# Altium PCB moteus_n1.PcbDoc (part 1 of 2)
Units mm, origin at the board's own origin, x right, y up, seen from the top; angles counter-clockwise.
Board outline 46 x 46 mm, 4 copper layers (Top, Route2, Route15, Bottom), stack 1.69 mm thick; 192 components, 104 nets, 644 pads, 479 vias.
Unrouted connection lines stored in the file: 50.
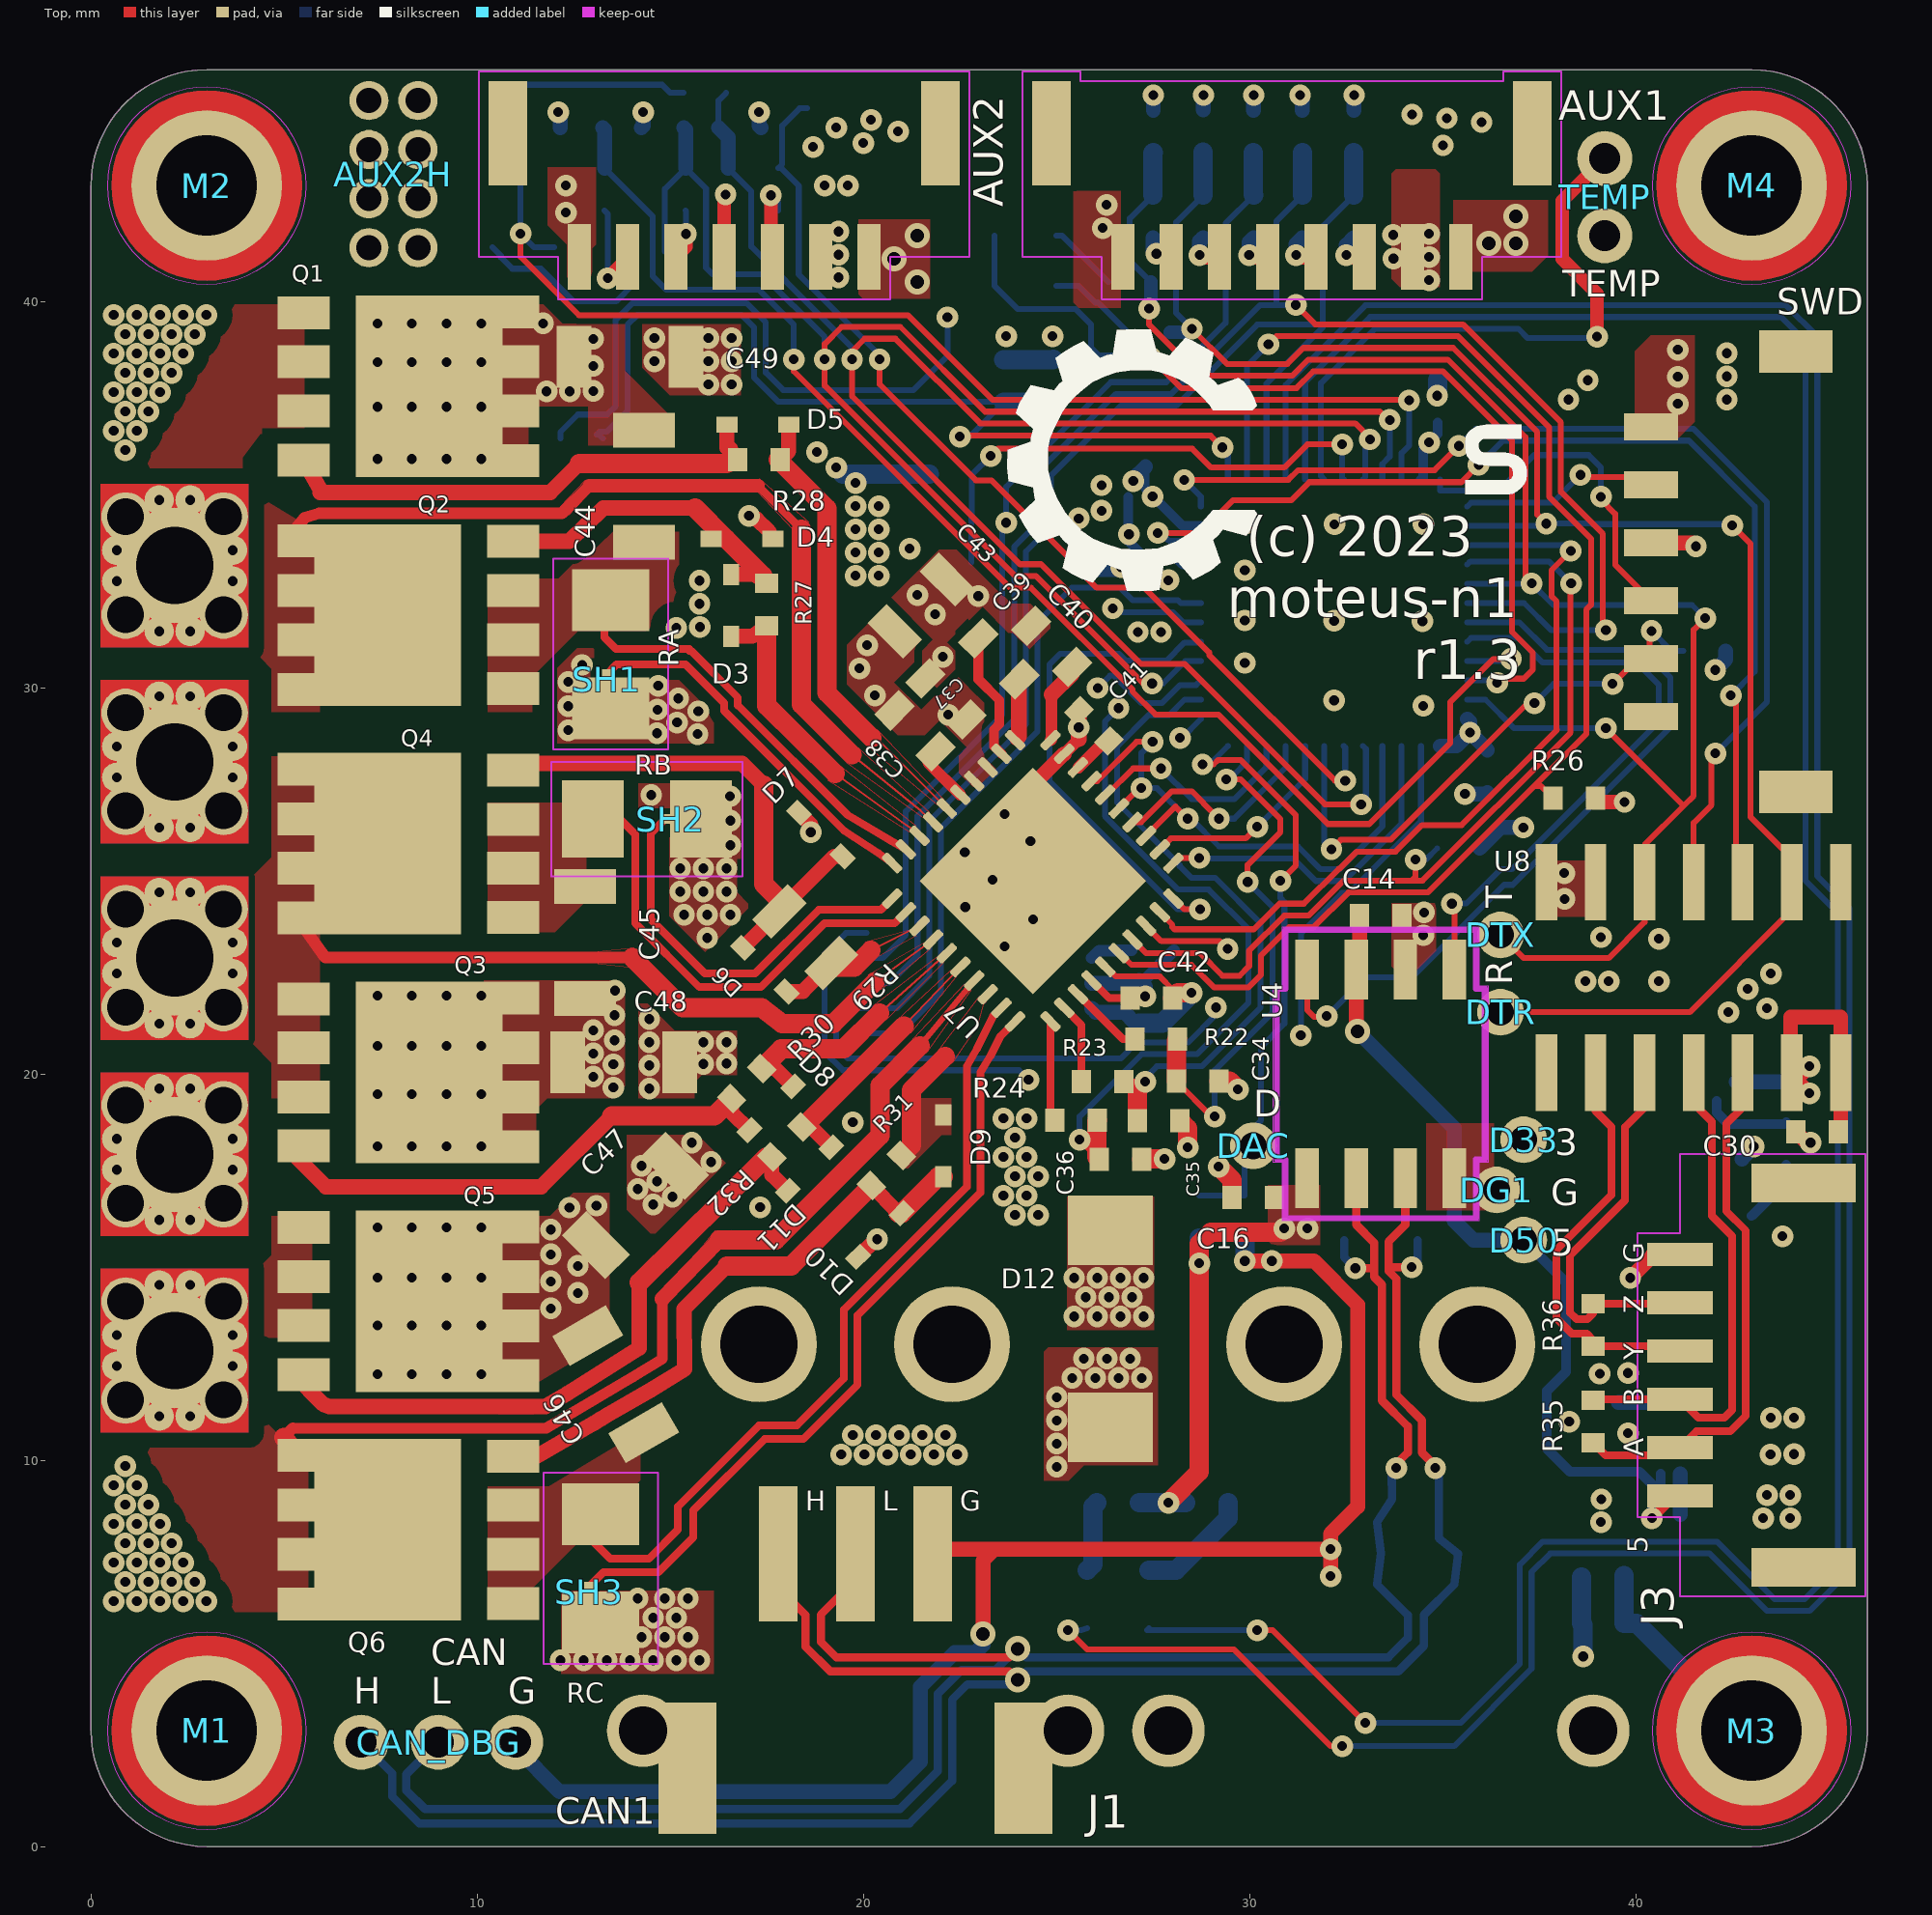
[diagram p0: Top view]
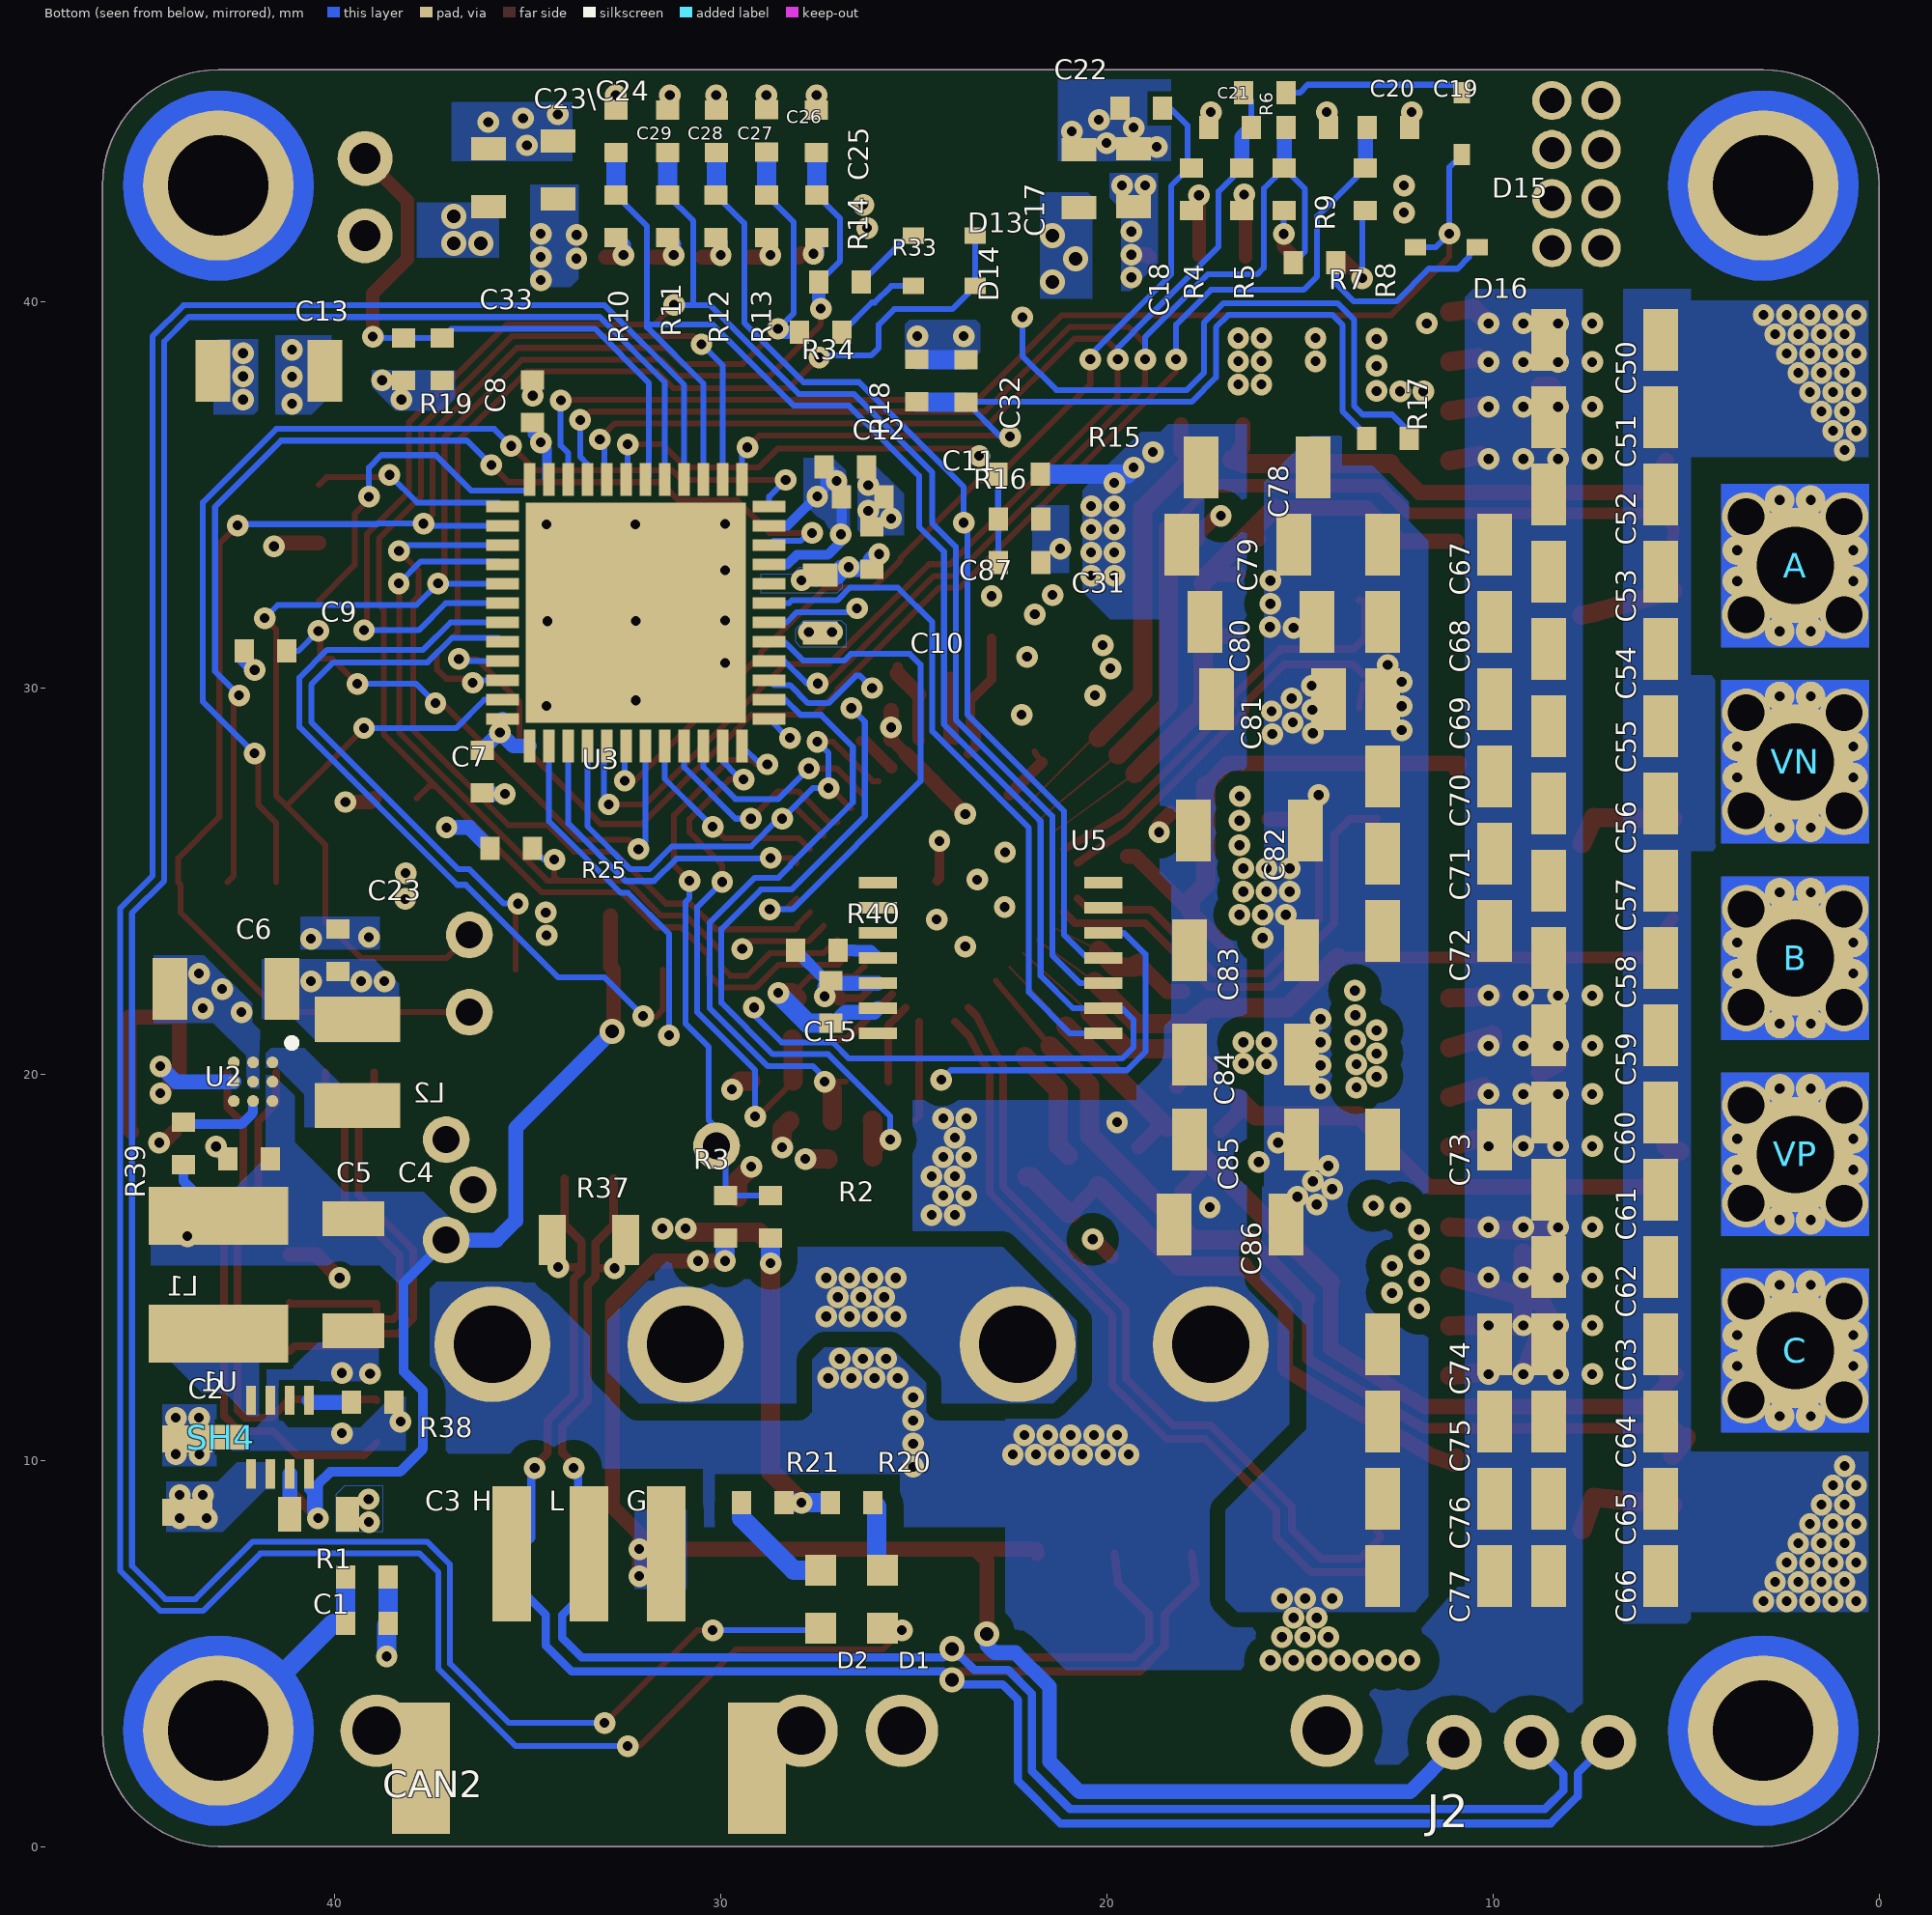
[diagram p1: Bottom view, seen from below]
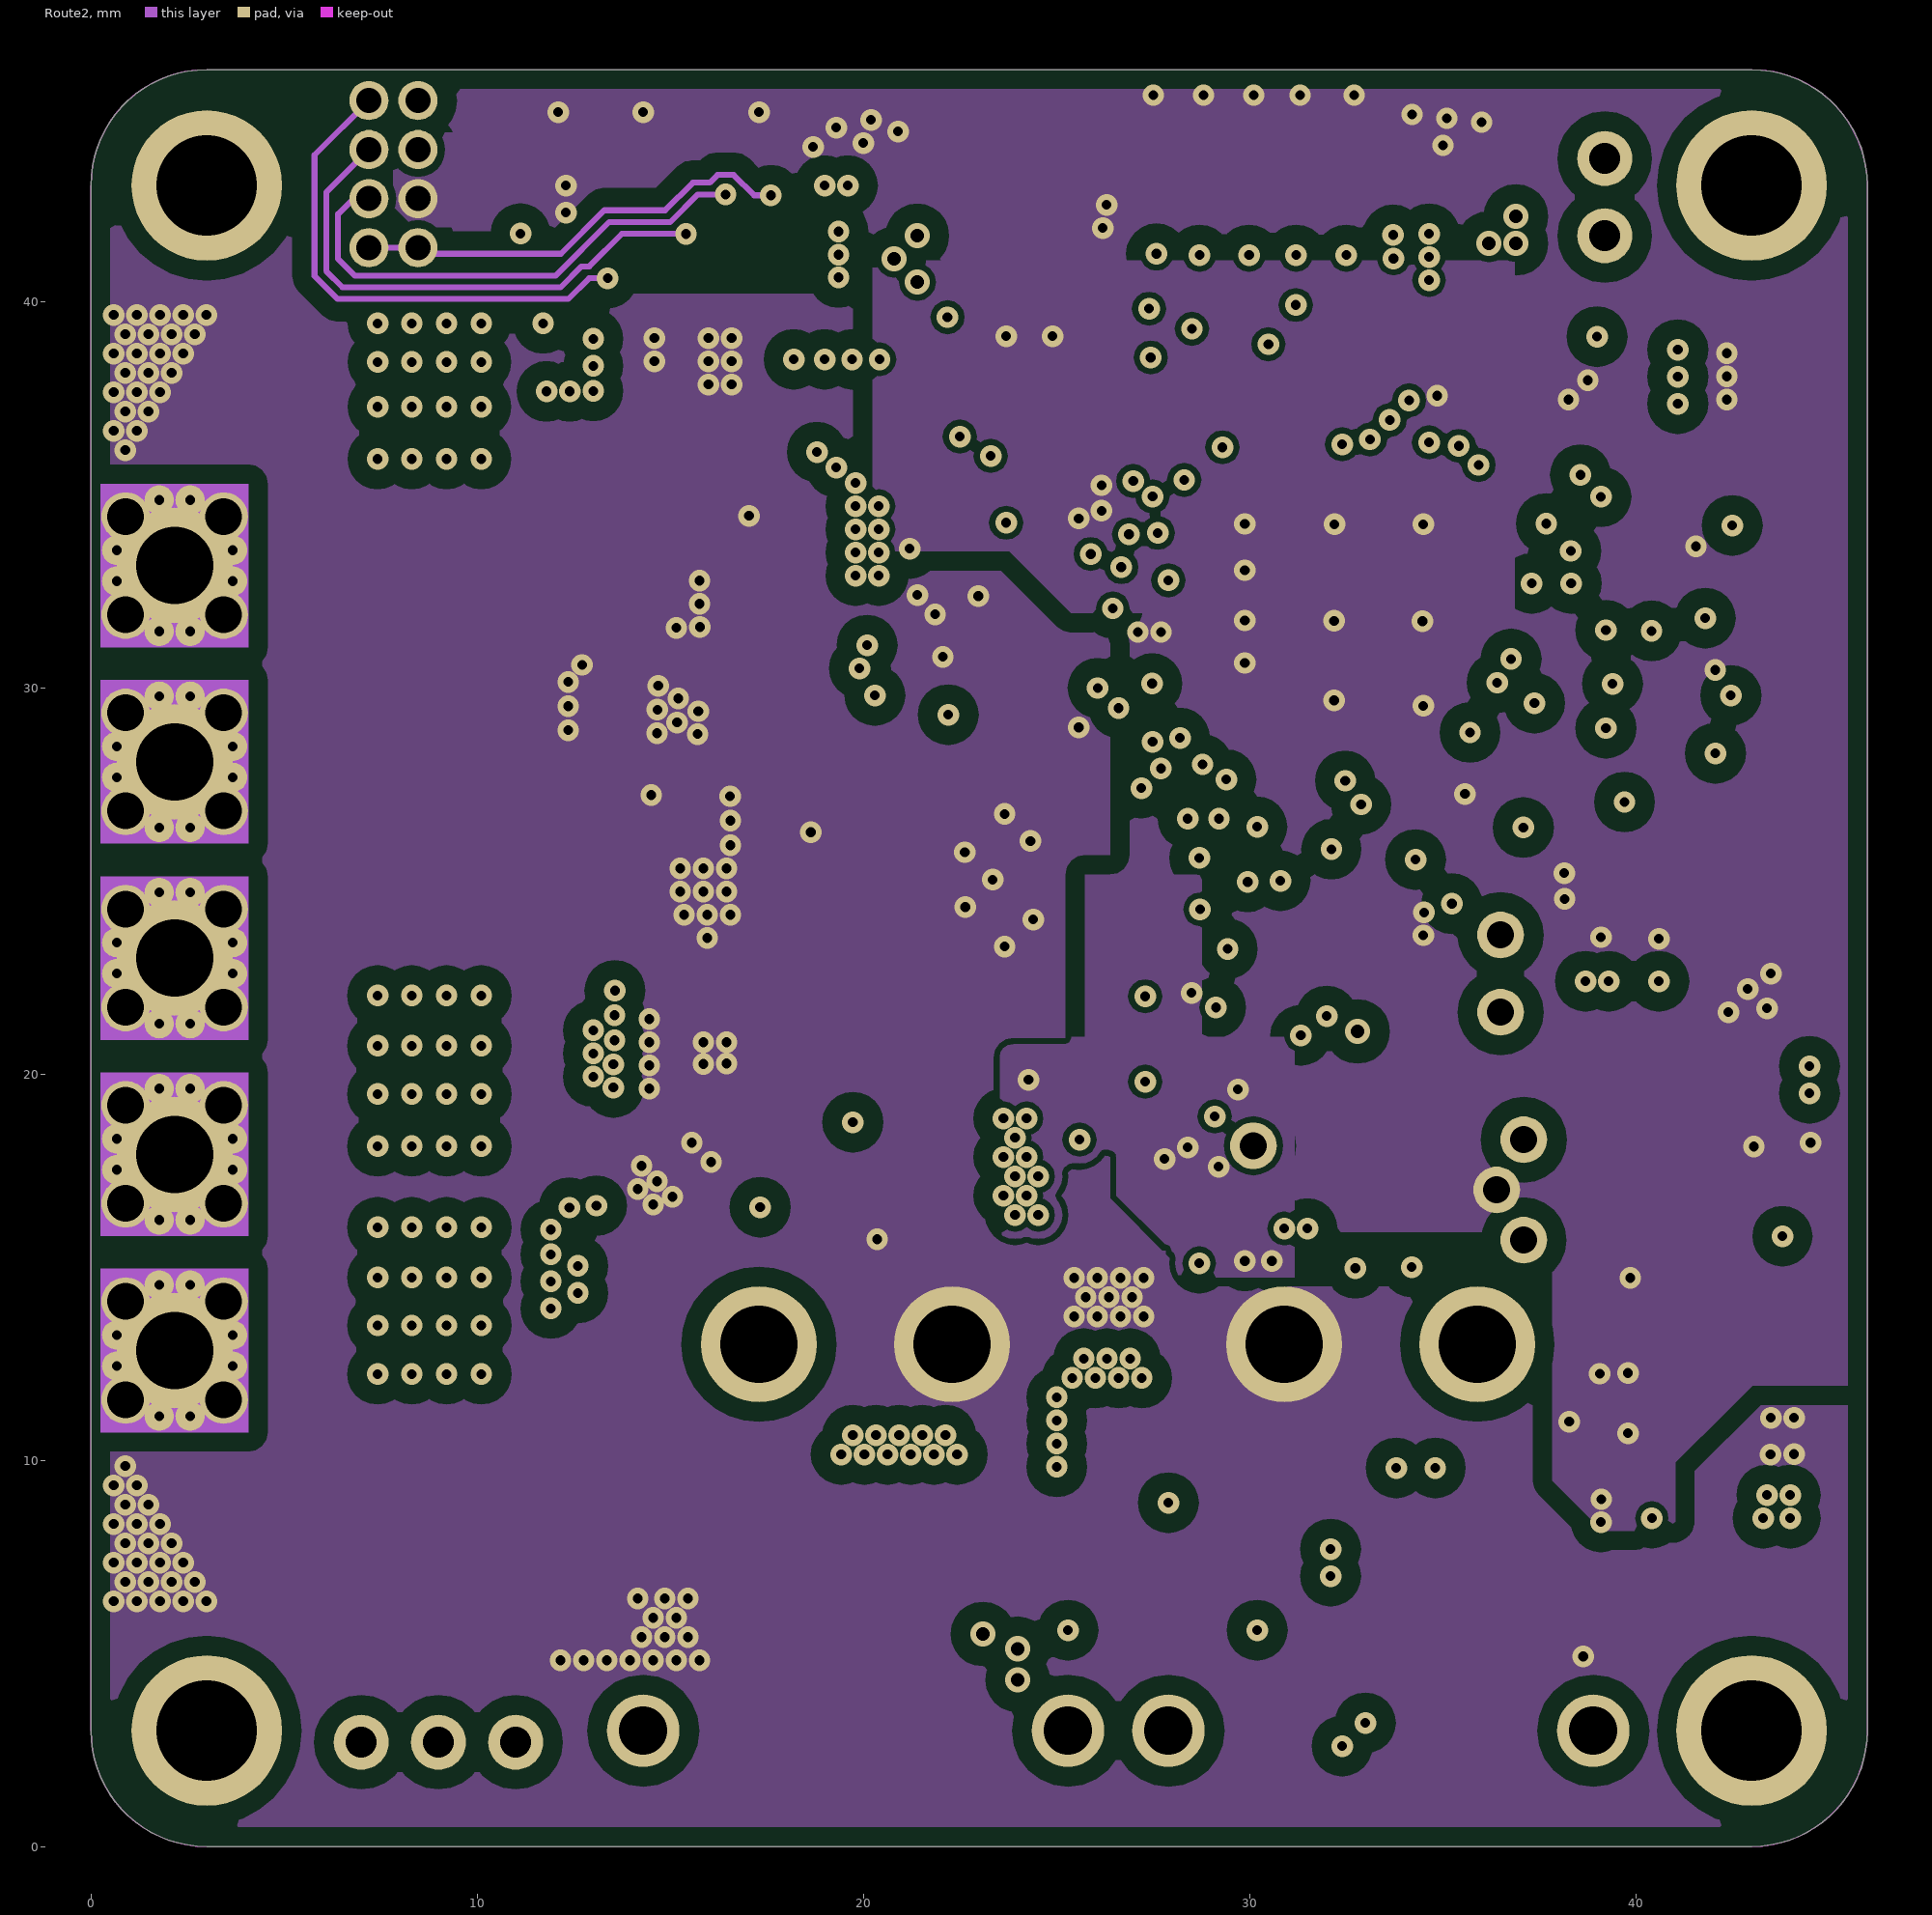
[diagram p2: Route2]
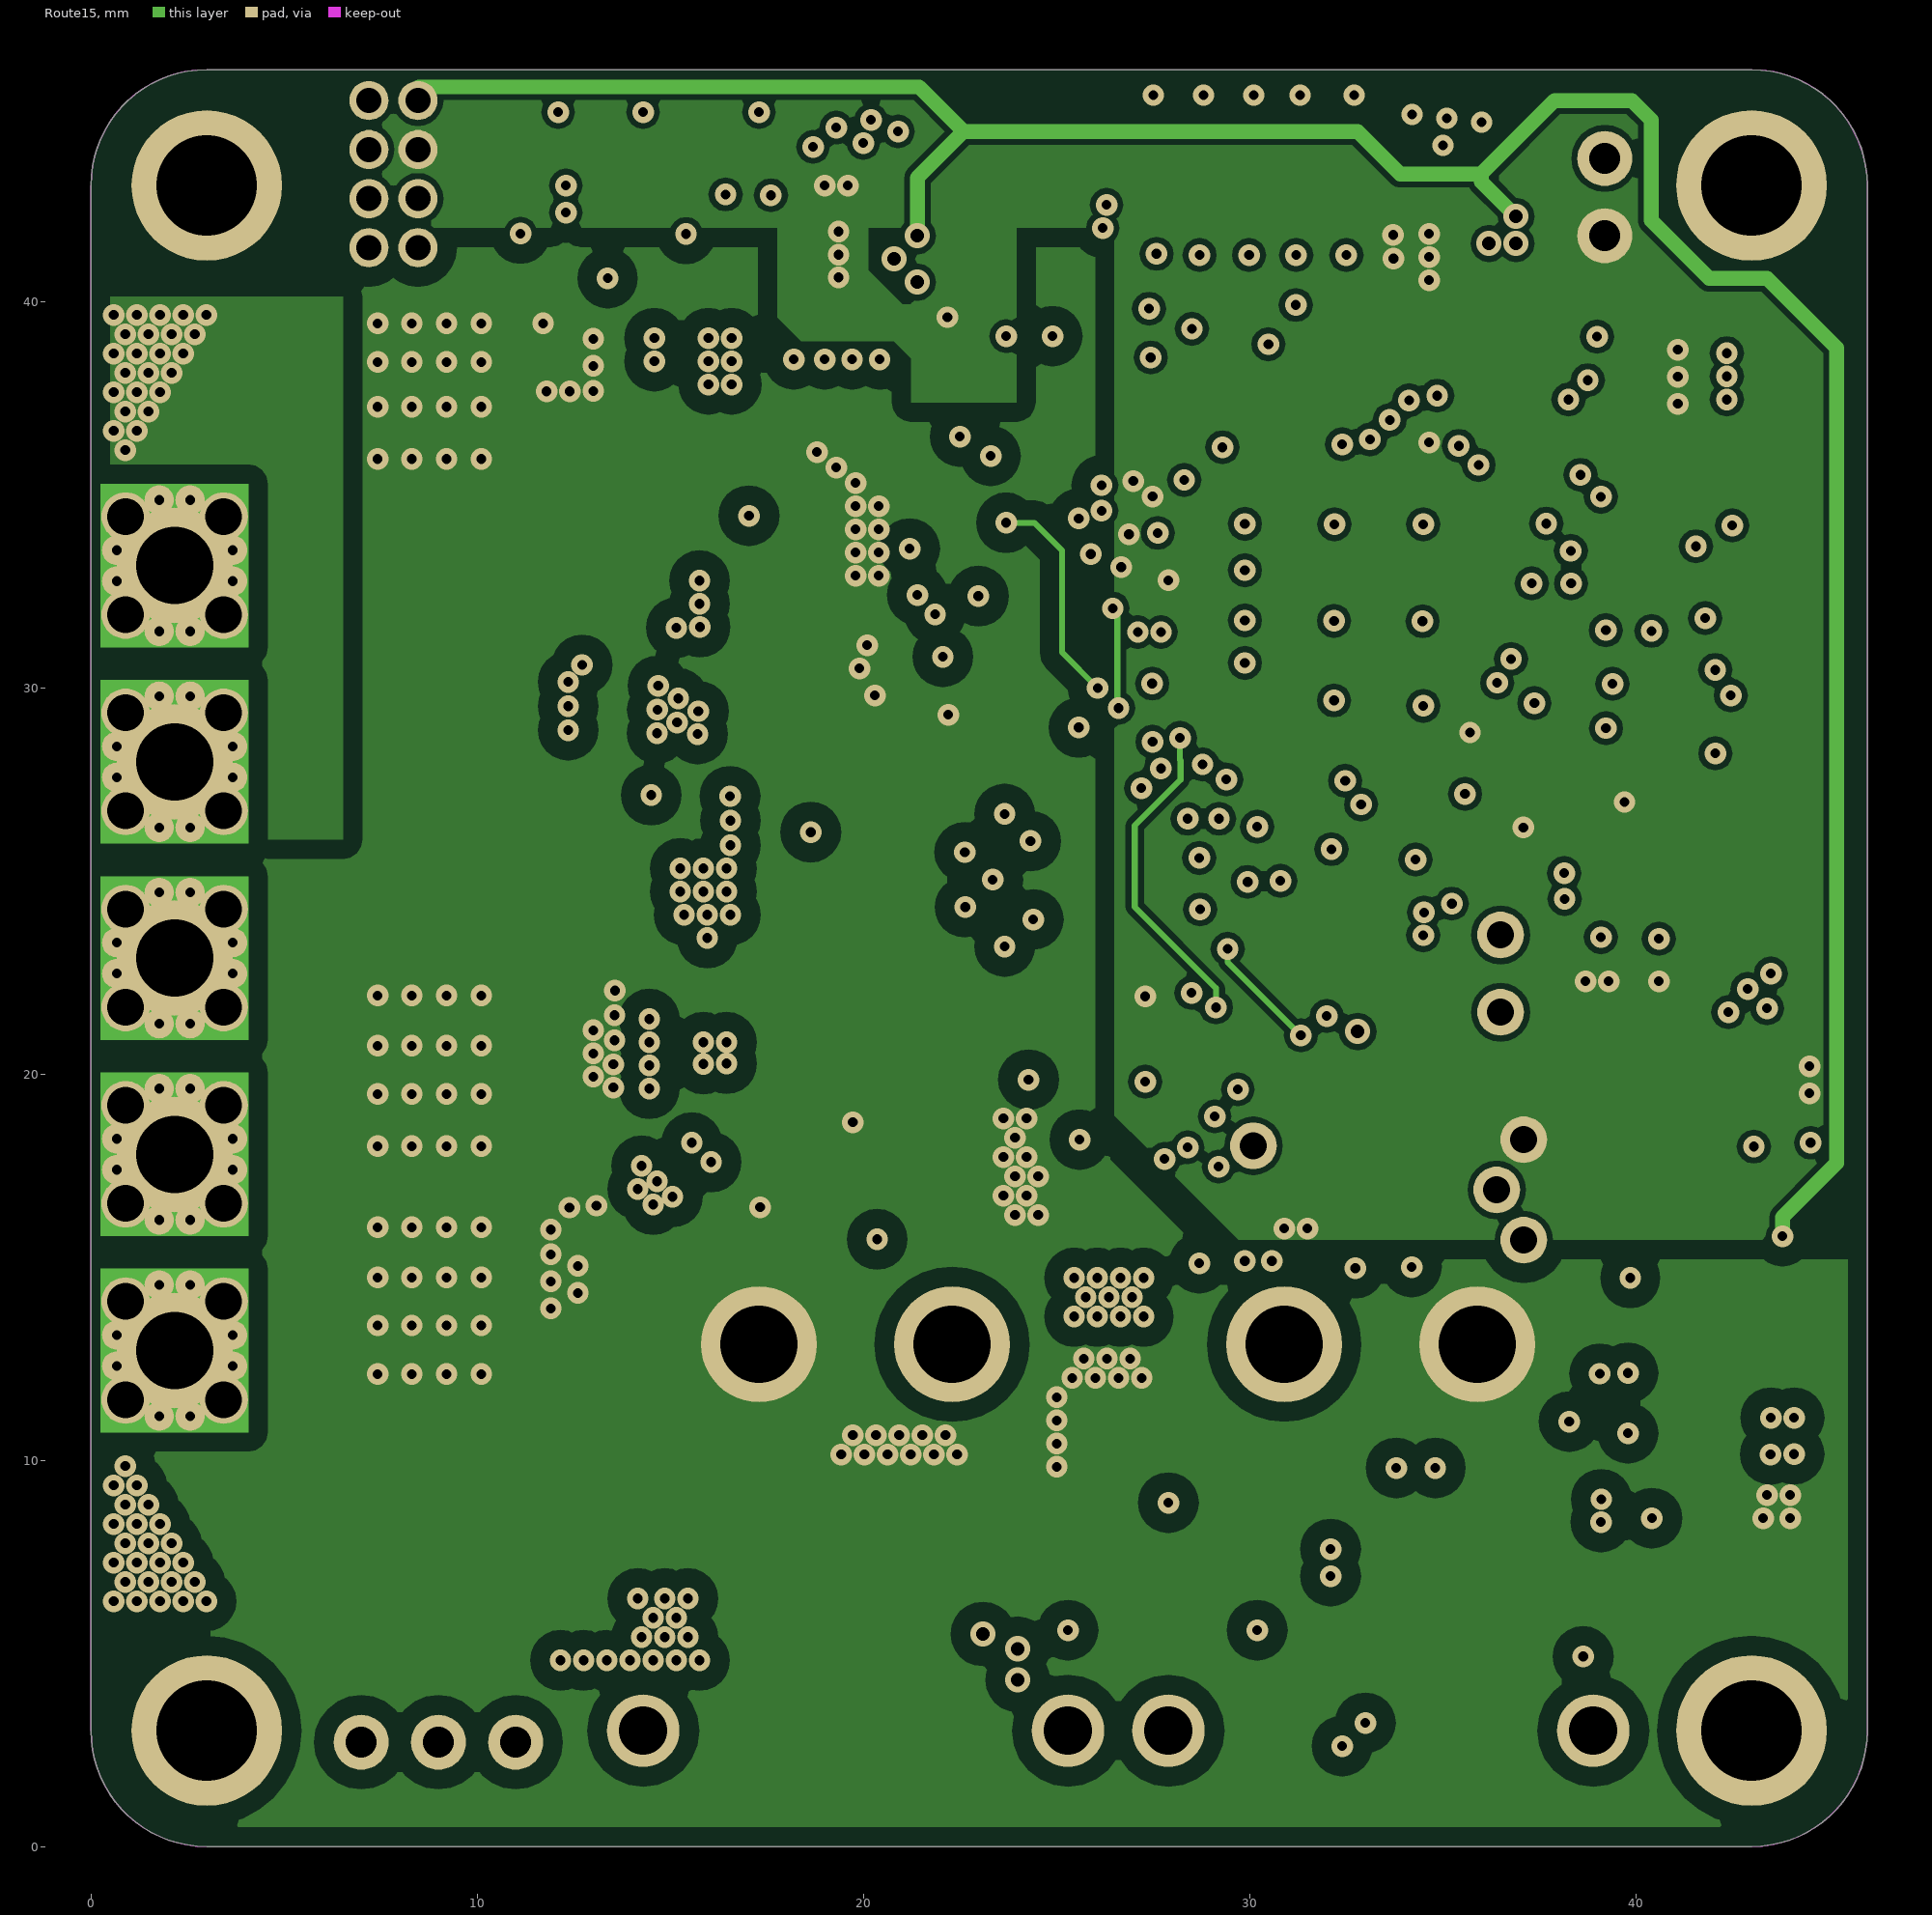
[diagram p3: Route15]

## Layer stack, top to bottom
Top Solder: solder mask 0.0102, Solder Resist, Dk 3.5
Top: signal copper 0.07
Dielectric 1: core 0.23, FR-4, Dk 4.8
Route2: signal copper 0.035
Dielectric2: core 0.93, FR-4, Dk 4.8
Route15: signal copper 0.035
Dielectric3: dielectric 0.32, FR-4, Dk 4.8
Bottom: signal copper 0.07
Bottom Solder: solder mask 0.0102, Solder Resist, Dk 3.5

## Board outline
3,46 ccw(c3,43) 0,43 0,3 ccw(c3,3) 3,0 43,0 ccw(c43,3) 46,3 46,43 ccw(c43,43) 43,46

## Design rules (kind name [scope] priority, off if disabled: settings)
BoardOutlineClearance mdCopperDimension [All] p1: gap=0.254 ignorepadtopadclearanceinfootprint=FALSE except(0: Arc-SplitContinuation Track-SplitContinuation SMDPad-SplitContinuation THPad-SplitContinuation Via-SplitContinuation Fill-SplitContinuation Poly-SplitContinuation Region-SplitContinuation Text-SplitContinuation)
Clearance Clearance_for_PolygonClass_Isolate_15.75 [InPolygonClass('Isolate_15.75') vs IsArc Or IsTrack Or IsPad Or IsVia Or IsFill Or IsRegion Or IsText] p1: gap=0.4 ignorepadtopadclearanceinfootprint=FALSE
Clearance Clearance_for_PolygonClass_Isolate_17.72 [InPolygonClass('Isolate_17.72') vs IsArc Or IsTrack Or IsPad Or IsVia Or IsFill Or IsRegion Or IsText] p2: gap=0.45 ignorepadtopadclearanceinfootprint=FALSE
Clearance Clearance_for_PolygonClass_Isolate_7.87 [InPolygonClass('Isolate_7.87') vs IsArc Or IsTrack Or IsPad Or IsVia Or IsFill Or IsRegion Or IsText] p3: gap=0.2 ignorepadtopadclearanceinfootprint=FALSE
Clearance Clearance_for_PolygonClass_Isolate_11.81 [InPolygonClass('Isolate_11.81') vs IsArc Or IsTrack Or IsPad Or IsVia Or IsFill Or IsRegion Or IsText] p4: gap=0.3 ignorepadtopadclearanceinfootprint=FALSE
Clearance Clearance_for_PolygonClass_Isolate_19.69 [InPolygonClass('Isolate_19.69') vs IsArc Or IsTrack Or IsPad Or IsVia Or IsFill Or IsRegion Or IsText] p5: gap=0.5 ignorepadtopadclearanceinfootprint=FALSE
Clearance "Clearance (Same Net)" [All] p6: gap=0.152 ignorepadtopadclearanceinfootprint=FALSE
Clearance Clearance_for_NetClass_HV [InNetClass('HV') vs InNetClass('HV')] p7: gap=0.13 ignorepadtopadclearanceinfootprint=FALSE
Clearance Clearance_for_NetClass_CAN [InNetClass('CAN') vs InNetClass('CAN')] p8: gap=0.127 ignorepadtopadclearanceinfootprint=FALSE
Clearance [All] p9: gap=0.152 ignorepadtopadclearanceinfootprint=FALSE
HoleSize HoleSize_For_NetClass_GATE [InNetClass('GATE')] p1: absolutevalues=TRUE maxlimit=0 minlimit=0 maxpercent=80.000 minpercent=20.000
HoleSize HoleSize_For_NetClass_HV [InNetClass('HV')] p2: absolutevalues=TRUE maxlimit=0 minlimit=0 maxpercent=80.000 minpercent=20.000
HoleSize HoleSize_For_NetClass_CAN [InNetClass('CAN')] p3: absolutevalues=TRUE maxlimit=0 minlimit=0 maxpercent=80.000 minpercent=20.000
HoleSize [All] p4: absolutevalues=TRUE maxlimit=2540 minlimit=0.254 maxpercent=80.000 minpercent=20.000
HoleToHoleClearance mdDrill [All] p1: gap=0.254 allowstackedmicrovias=TRUE
MinimumSolderMaskSliver [All] p1 off: minsoldermaskwidth=0.254
PasteMaskExpansion Expansion_SMDPaste_OFF [InPadClass('SMDPaste_OFF')] p1: expansion=0
PasteMaskExpansion mlMinCreamFrame [All] p2: expansion=0
PolygonConnect PolygonConnect_For_PolygonThermal_ON_Width100000_Gap100000 [InPolygonClass('PolygonThermal_ON_Width100000_Gap100000') vs Not IsVia] p1: connectstyle=Relief reliefconductorwidth=0.254 reliefentries=4 polygonreliefangle="90 Angle" airgapwidth=0.254
PolygonConnect PolygonConnect_For_PolygonThermal_ON_Width19700_Gap100000 [InPolygonClass('PolygonThermal_ON_Width19700_Gap100000') vs Not IsVia] p2: connectstyle=Relief reliefconductorwidth=0.05 reliefentries=4 polygonreliefangle="90 Angle" airgapwidth=0.254
PolygonConnect PolygonConnect_For_PolygonThermal_OFF [InPolygonClass('PolygonThermal_OFF')] p3: connectstyle=Direct reliefconductorwidth=0.254 reliefentries=4 polygonreliefangle="90 Angle" airgapwidth=0.254
PolygonConnect ThermalVias [IsVia] p4: connectstyle=Direct reliefconductorwidth=0.254 reliefentries=4 polygonreliefangle="90 Angle" airgapwidth=0.254
PolygonConnect [All] p5: connectstyle=Relief reliefconductorwidth=0.254 reliefentries=4 polygonreliefangle="90 Angle" airgapwidth=0.254
RoutingVias [All] p1: holewidth=0.254 width=0.559 viastyle="Through Hole" minholewidth=0.254 minwidth=0.559 maxholewidth=2.54 maxwidth=2.54
SolderMaskExpansion Expansion_SMDSolder_OFF [InPadClass('SMDSolder_OFF')] p1: expansion=0 istentingtop=FALSE
SolderMaskExpansion mlMinStopFrame [All] p2: expansion=0.051 istentingtop=FALSE
Width Width_For_NetClass_GATE [InNetClass('GATE')] p1: maxlimit=0.768 minlimit=0.254 preferedwidth=0.384
Width Width_For_NetClass_HV [InNetClass('HV')] p2: maxlimit=0.254 minlimit=2539.975 preferedwidth=0.127 toplayer_minwidth=0 midlayer1_minwidth=0 midlayer14_minwidth=0 bottomlayer_minwidth=0 minimp=50.000000 maximp=50.000000 favimp=50.000000
Width Width_For_NetClass_CAN [InNetClass('CAN')] p3: maxlimit=0.254 minlimit=0.216 preferedwidth=0.216
Width [All] p4: maxlimit=0.254 minlimit=0.152 preferedwidth=0.152
26 further rules are at their usual default settings.

## Classes and differential pairs
polygon class PolygonThermal_ON_Width100000_Gap100000: Polygon_3_Net_V-
polygon class PolygonThermal_ON_Width19700_Gap100000: Polygon_1_Net_GHC_D
polygon class PolygonThermal_OFF: Polygon_1_Net_+3V3 Polygon_1_Net_+5V Polygon_1_Net_GHA Polygon_1_Net_GHB Polygon_1_Net_GHC Polygon_1_Net_GLA Polygon_1_Net_GLB Polygon_1_Net_GLC Polygon_1_Net_GND Polygon_1_Net_N$5 Polygon_1_Net_SHA Polygon_1_Net_SHB Polygon_1_Net_SHC Polygon_1_Net_SXA_P Polygon_1_Net_SXB_P Polygon_1_Net_SXC_P Polygon_1_Net_V+ Polygon_1_Net_V- Polygon_1_Net_VSW Polygon_2_Net_+3V3 Polygon_2_Net_+5V Polygon_2_Net_GLC Polygon_2_Net_GND Polygon_2_Net_SHA Polygon_2_Net_SHB Polygon_2_Net_SHC Polygon_2_Net_V+ Polygon_2_Net_V- Polygon_3_Net_+3V3 Polygon_3_Net_+5V Polygon_3_Net_GND Polygon_3_Net_SHA Polygon_3_Net_SHB Polygon_3_Net_SHC Polygon_3_Net_V+ Polygon_4_Net_+3V3 Polygon_4_Net_+5V Polygon_4_Net_GND Polygon_4_Net_SHA Polygon_4_Net_V+ Polygon_4_Net_V- Polygon_5_Net_+3V3 Polygon_5_Net_+5V Polygon_5_Net_GND Polygon_5_Net_V+ Polygon_5_Net_V- Polygon_6_Net_+3V3 Polygon_6_Net_+5V Polygon_6_Net_GND Polygon_6_Net_V+ Polygon_6_Net_V- Polygon_7_Net_+3V3 Polygon_7_Net_GND Polygon_7_Net_V+ Polygon_7_Net_V- Polygon_8_Net_+3V3 Polygon_8_Net_GND Polygon_8_Net_V+ Polygon_8_Net_V- Polygon_9_Net_+3V3 Polygon_9_Net_GND Polygon_9_Net_V+ Polygon_9_Net_V- Polygon_10_Net_+3V3 Polygon_10_Net_GND Polygon_10_Net_V+ Polygon_10_Net_V- Polygon_11_Net_+3V3 Polygon_11_Net_GND Polygon_11_Net_V+ Polygon_11_Net_V- Polygon_12_Net_+3V3 Polygon_12_Net_GND Polygon_12_Net_V+ Polygon_12_Net_V- Polygon_13_Net_GND Polygon_13_Net_V+ Polygon_13_Net_V- Polygon_14_Net_GND Polygon_14_Net_V+ Polygon_14_Net_V- Polygon_15_Net_GND Polygon_15_Net_V+ Polygon_15_Net_V- Polygon_16_Net_GND Polygon_16_Net_V- Polygon_17_Net_GND Polygon_17_Net_V- Polygon_18_Net_GND Polygon_18_Net_V- Polygon_19_Net_GND Polygon_19_Net_V- Polygon_20_Net_GND Polygon_20_Net_V- Polygon_21_Net_GND Polygon_22_Net_GND Polygon_23_Net_GND Polygon_24_Net_GND Polygon_25_Net_GND Polygon_26_Net_GND
polygon class Isolate_15.75: Polygon_1_Net_SXA_P Polygon_2_Net_SHC Polygon_4_Net_SHA Polygon_6_Net_V+ Polygon_9_Net_V+ Polygon_12_Net_V+ Polygon_14_Net_V+ Polygon_15_Net_V- Polygon_17_Net_V-
polygon class Isolate_17.72: Polygon_13_Net_V+
polygon class Isolate_7.87: Polygon_7_Net_V+ Polygon_8_Net_V- Polygon_20_Net_V- Polygon_26_Net_GND
polygon class Isolate_11.81: Polygon_4_Net_V-
polygon class Isolate_19.69: Polygon_1_Net_GND Polygon_1_Net_V+ Polygon_1_Net_V- Polygon_2_Net_V- Polygon_3_Net_GND Polygon_3_Net_V- Polygon_11_Net_V+
pad class SMDSolder_OFF: SH1-1 SH1-2 SH2-1 SH2-2 SH3-1 SH3-2 SH4-1 SH4-2
pad class SMDPaste_OFF: Q1-PAD Q3-PAD Q5-PAD SH1-1 SH1-2 SH2-1 SH2-2 SH3-1 SH3-2 SH4-1 SH4-2 U3-49 U7-PAD
net class GATE: GHA GHA_D GHB GHB_D GHC GHC_D GLA GLA_D GLB GLB_D GLC GLC_D
net class HV: SHA SHB SHC
net class CAN: CAN_N CAN_P

## Components (designator, comment, footprint, x,y, rotation, side; value= is the part's Value field where it differs from the comment)
A "" 16AWG_TERM 2.17,33.16 r90 bottom
AUX1 "" JST_SM08B-GHS-TB(LF)(SN) 31.1,41.15 r180 top
AUX2 "" JST_SM07B-GHS-TB(LF)(SN) 16.4,43 r180 top
AUX2H "" PH2X4 7.2,45.2 r0 top
B "" 16AWG_TERM 2.17,23 r90 bottom
C "" 16AWG_TERM 2.17,12.84 r90 bottom
C1 "" C0402 39.15,5.78 r180 bottom
C2 "" C0805 43.8,9.6 r90 bottom
C3 "" C0603 40.4,8.6 r180 bottom
C4 "" C1206 39.5,14.8 r270 bottom
C5 "" C0402 42.2,17.8 r0 bottom
C6 "" C1206 42.8,22.2 r0 bottom
C7 "" C0402 36.16,27.83 r270 bottom
C8 "" C0402 34.87,37.42 r90 bottom
C9 "" C0402 41.78,30.95 r0 bottom
C10 "" C0603 27.41,32.16 r270 bottom
C11 "" C0402 26.31,34.94 r180 bottom
C12 "" C0402 26.76,35.72 r180 bottom
C13 "" C1206 41.69,38.2 r180 bottom
C14 "" C0402 33.4,24.1 r0 top
C15 "" C0402 27.14,21.87 r270 bottom
C16 "" C0402 30.1,16.8 r180 top
C17 "" C0603 20.71,43.18 r90 bottom
C18 "" C0603 19.3,43.2 r90 bottom
C19 "" C0402 12.7,44.5 r180 bottom
C20 "" C0402 14.8,44.5 r180 bottom
C21 "" C0402 16.8,44.5 r0 bottom
C22 "" C0402 19.1,45 r0 bottom
C23 "" C0402 39.9,23.2 r90 bottom
C23\ "" C0603 36,43.2 r90 bottom
C24 "" C0603 34.2,43.4 r90 bottom
C25 "" C0402 27.51,44.4 r90 bottom
C26 "" C0402 28.8,44.41 r90 bottom
C27 "" C0402 30.1,44.4 r90 bottom
C28 "" C0402 31.37,44.4 r90 bottom
C29 "" C0402 32.7,44.4 r90 bottom
C30 "" C0402 44.7,18.5 r180 top
C31 "" C0402 22.25,33.24 r180 bottom
C32 "" C0402 23.64,37.94 r90 bottom
C33 "" C0402 37.2,38.5 r270 bottom
C34 "" C0402 28.66,19.81 r0 top
C35 "" C0402 27.65,18.79 r0 top
C36 "" C0402 26.66,17.79 r0 top
C37 "" C0603 22.14,29.71 r135 top
C38 "" C0603 21.34,28.88 r315 top
C39 "" C0603 23.51,30.75 r315 top
C40 "" C0603 24.88,31.07 r315 top
C41 "" C0402 25.97,29.01 r315 top
C42 "" C0402 27.46,21.96 r180 top
C43 "" C0805 21.49,32.13 r45 top
C44 "" C1206 14.32,35.21 r270 top
C45 "" C1206 12.8,23.4 r90 top
C46 "" C1206 13.59,11.97 r300 top
C47 "" C1206 14.1,16.6 r45 top
C48 "" C1206 13.8,20.3 r0 top
C49 "" C1206_NOBORDER 13.96,38.57 r0 top
C50 "" C1206_NOBORDER 7.1,39 r180 bottom
C51 "" C1206_NOBORDER 7.1,37 r180 bottom
C52 "" C1206_NOBORDER 7.1,35 r180 bottom
C53 "" C1206_NOBORDER 7.1,33 r180 bottom
C54 "" C1206_NOBORDER 7.1,31 r180 bottom
C55 "" C1206_NOBORDER 7.1,29 r180 bottom
C56 "" C1206_NOBORDER 7.1,27 r180 bottom
C57 "" C1206_NOBORDER 7.1,25 r180 bottom
C58 "" C1206_NOBORDER 7.1,23 r180 bottom
C59 "" C1206_NOBORDER 7.1,21 r180 bottom
C60 "" C1206_NOBORDER 7.1,19 r180 bottom
C61 "" C1206_NOBORDER 7.1,17 r180 bottom
C62 "" C1206_NOBORDER 7.1,15 r180 bottom
C63 "" C1206_NOBORDER 7.1,13 r180 bottom
C64 "" C1206_NOBORDER 7.1,11 r180 bottom
C65 "" C1206_NOBORDER 7.1,9 r180 bottom
C66 "" C1206_NOBORDER 7.1,7 r180 bottom
C67 "" C1206_NOBORDER 11.4,33.7 r0 bottom
C68 "" C1206_NOBORDER 11.4,31.7 r0 bottom
C69 "" C1206_NOBORDER 11.4,29.7 r0 bottom
C70 "" C1206_NOBORDER 11.4,27.7 r0 bottom
C71 "" C1206_NOBORDER 11.4,25.7 r0 bottom
C72 "" C1206_NOBORDER 11.4,23.7 r0 bottom
C73 "" C1206_NOBORDER 11.4,18.3 r0 bottom
C74 "" C1206_NOBORDER 11.4,13 r0 bottom
C75 "" C1206_NOBORDER 11.4,11 r0 bottom
C76 "" C1206_NOBORDER 11.4,9 r0 bottom
C77 "" C1206_NOBORDER 11.4,7 r0 bottom
C78 "" C1206_NOBORDER 16.1,35.7 r180 bottom
C79 "" C1206_NOBORDER 16.6,33.7 r180 bottom
C80 "" C1206_NOBORDER 16,31.7 r180 bottom
C81 "" C1206_NOBORDER 15.7,29.7 r180 bottom
C82 "" C1206_NOBORDER 16.3,26.3 r180 bottom
C83 "" C1206_NOBORDER 16.4,23.2 r180 bottom
C84 "" C1206_NOBORDER 16.4,20.5 r180 bottom
C85 "" C1206_NOBORDER 16.4,18.3 r180 bottom
C86 "" C1206_NOBORDER 16.8,16.1 r180 bottom
C87 "" C0402 26.08,33.62 r90 bottom
CAN1 "" JST_S3B-PH-SM4-TB(LF)(SN) 19.8,4.6 r180 top
CAN2 "" JST_S3B-PH-SM4-TB(LF)(SN) 33.4,4.6 r0 bottom
CAN_DBG "" 1X3 9,2.7 r0 top
D1 "" LED0603 25.8,6.4 r90 bottom
D2 "" LED0603 27.4,6.4 r90 bottom
D3 "" SODFL1608X70N 16.58,32.13 r90 top
D4 "" SODFL1608X70N 16.86,33.85 r0 top
D5 "" SODFL1608X70N 17.27,36.81 r180 top
D6 "" SODFL1608X70N 17.45,22.7 r135 top
D7 "" SODFL1608X70N 18.9,26.2 r135 top
D8 "" SODFL1608X70N 17.62,19.11 r225 top
D9 "" SODFL1608X70N 22.07,18.14 r270 top
D10 "" SODFL1608X70N 20.43,15.83 r225 top
D11 "" SODFL1608X70N 18.61,17.54 r225 top
D12 "" DO214AA 26.4,13.4 r90 top
D13 "" SODFL1608X70N 24.2,41.7 r180 bottom
D14 "" SODFL1608X70N 24.2,40.4 r180 bottom
D15 "" SODFL1608X70N 10.8,44.6 r270 bottom
D16 "" SODFL1608X70N 11.2,41.4 r0 bottom
D33 "" 24AWG_PAD 37.1,18.3 r0 top
D50 "" 24AWG_PAD 37.1,15.7 r0 top
DAC "" 24AWG_PAD 30.1,18.14 r180 top
DG1 "" 24AWG_PAD 36.4,17 r0 top
DTR "" 24AWG_PAD 36.5,21.6 r0 top
DTX "" 24AWG_PAD 36.5,23.6 r0 top
J1 "" XT30PW_MALE 33.4,13 r180 top
J2 "" XT30PW_MALE 19.8,13 r0 bottom
J3 "" JST_SM06B-GHS-TB(LF)(SN) 43,12.2 r90 top
L1 "" IND_BOURNS_SRN4018 43,14.8 r270 bottom
L2 "" IND_1008_WE-PMI_WRE 39.4,20.3 r270 bottom
M1 "" M2.5MOUNT 3,3 r0 top
M2 "" M2.5MOUNT 3,43 r0 top
M3 "" M2.5MOUNT 43,3 r0 top
M4 "" M2.5MOUNT 43,43 r0 top
Q1 "" SOP_ADVANCE_8_VIAS 8.41,37.8 r270 top
Q2 "" SOP_ADVANCE_8 8.04,31.88 r90 top
Q3 "" SOP_ADVANCE_8_VIAS 8.41,20.04 r270 top
Q4 "" SOP_ADVANCE_8 8.04,25.96 r90 top
Q5 "" SOP_ADVANCE_8_VIAS 8.41,14.12 r270 top
Q6 "" SOP_ADVANCE_8 8.04,8.2 r90 top
R1 "" R0402 39.15,6.98 r180 bottom
R2 "" R0402 28.7,16.3 r270 bottom
R3 "" R0402 29.87,16.3 r90 bottom
R4 "" R0402 17.8,42.9 r90 bottom
R5 "" R0402 16.5,42.9 r90 bottom
R6 "" R0402 15.9,45.4 r0 bottom
R7 "" R0402 14.61,41 r0 bottom
R8 "" R0402 13.3,42.9 r90 bottom
R9 "" R0402 15.4,42.9 r90 bottom
R10 "" R0402 32.7,42.2 r90 bottom
R11 "" R0402 31.37,42.2 r90 bottom
R12 "" R0402 30.11,42.2 r90 bottom
R13 "" R0402 28.8,42.2 r90 bottom
R14 "" R0402 27.5,42.2 r90 bottom
R15 "" R0402 22.26,35.53 r180 bottom
R16 "" R0402 22.25,34.37 r0 bottom
R17 "" R0402 12.71,36.45 r0 bottom
R18 "" R0402 24.92,37.95 r90 bottom
R19 "" R0402 38.2,38.5 r270 bottom
R20 "" R0402 26.6,8.9 r180 bottom
R21 "" R0402 28.9,8.9 r0 bottom
R22 "" R0402 27.59,20.9 r0 top
R23 "" R0402 26.2,19.8 r0 top
R24 "" R0402 25.51,18.8 r0 top
R25 "" R0402 35.41,25.84 r180 bottom
R26 "" R0402 38.41,27.14 r180 top
R27 "" R0402 17.5,32.15 r90 top
R28 "" R0402 17.3,35.9 r180 top
R29 "" R0805 18.5,23.54 r135 top
R30 "" R0402 16.98,19.75 r225 top
R31 "" R0402 20.6,17.5 r225 top
R32 "" R0402 18.02,18.24 r225 top
R33 "" R0402 26.9,40.5 r0 bottom
R34 "" R0402 27.4,39.2 r0 bottom
R35 "" R0402 38.9,11 r270 top
R36 "" R0402 38.9,13.5 r270 top
R37 "" R0805 33.4,15.7 r180 bottom
R38 "" R0402 39,11.5 r0 bottom
R39 "" R0402 43.9,18.2 r270 bottom
R40 "" R0402 27.5,23.2 r0 bottom
RA "" M1206 13.46,30.87 r90 top
RB "" M1206 14.4,26.6 r180 top
RC "" M1206 13.2,7.2 r90 top
SH1 "" SHORT_TOP-50 13.36,30.22 r90 top
SH2 "" SHORT_TOP-50 15,26.6 r180 top
SH3 "" SHORT_TOP-50 12.9,6.6 r90 top
SH4 "" SHORT_TOP-MEDIUM 42.94,10.6 r0 bottom
SWD "" JST_S6B-ZR-SM4A-TF(LF)(SN) 40.4,33 r270 top
TEMP "" 1X2 39.2,42.7 r90 top
U1 "" 21-0487A_MXM 41.4,10.6 r90 bottom
U2 "" BGA9C50P3X3_165X187X66 42.1,19.8 r270 bottom
U3 "" QFN50P700X700X60-49N 32.19,31.94 r90 bottom
U4 "" SOIC8 33.4,20 r270 top
U5 "" TSSOP14 23,23 r90 bottom
U7 "" WQFN-40 24.39,25 r45 top
U8 "" D14 41.5,22.5 r270 top
VN "" 16AWG_TERM 2.17,28.08 r90 bottom
VP "" 16AWG_TERM 2.17,17.92 r90 bottom

## Footprints (in the part's own frame and the unit in brackets; to place one, negate y for a bottom-side part, rotate by r counter-clockwise, add the part's x,y. Pads: shape width x height; smd on the part's side, far side on the other; paste and mask are expansions set on the pad)
1X2 [mil] "1X2"
  round 56 hole 31.5: 1(-39.37,0) 2(39.37,0)
  body extent -68,-28 68,28, height 50
1X3 [mil] "1X3"
  round 56 hole 31.5: 1(-78.74,0) 2(0,0) 3(78.74,0)
  body extent -107,-28 107,28, height 50
16AWG_TERM [mil] "16AWG_TERM"
  round 118.11 hole 78.74: 1(0,0)
  round 30 hole 10: 2(-66.93,15.75) 3(-66.93,-15.75) 4(66.93,15.75) 5(66.93,-15.75) 6(-15.75,59.06) 7(15.75,59.06) 8(-15.75,-59.06) 9(15.75,-59.06)
  round 49.4 hole 37.4: 10(-50,50) 11(50,50) 12(-50,-50) 13(50,-50)
  Top region: -83.21,75.33 83.21,75.33 83.21,-75.33 -83.21,-75.33
  Route2 region: -83.21,75.33 83.21,75.33 83.21,-75.33 -83.21,-75.33
  Route15 region: -83.21,75.33 83.21,75.33 83.21,-75.33 -83.21,-75.33
  Bottom region: -83.21,75.33 83.21,75.33 83.21,-75.33 -83.21,-75.33
  body extent -82,-75 82,75, height 150
21-0487A_MXM [mil] "21-0487A_MXM"
  rect 30x10 smd: 1(-37.5,29.53) 2(-37.5,9.84) 3(-37.5,-9.84) 4(-37.5,-29.53) 5(37.5,-29.53) 6(37.5,-9.84) 7(37.5,9.84) 8(37.5,29.53)
  body extent -52,-35 52,35, height 50
24AWG_PAD [mm] "24AWG_PAD"
  round 1.208 hole 0.7: P$1(0,0)
  body extent -0.62,-0.62 0.62,0.62, height 1.27
BGA9C50P3X3_165X187X66 [mm] "BGA9C50P3X3_165X187X66"
  rrect100% 0.306x0.306 smd: A1(-0.5,0.5) A2(0,0.5) A3(0.5,0.5) B1(-0.5,0) B2(0,0) B3(0.5,0) C1(-0.5,-0.5) C2(0,-0.5) C3(0.5,-0.5)
  silkscreen extent -1.1,0.9 -0.9,1.1, body extent -0.67,-0.67 0.67,0.67, height 1.27
C0402 [mm] "C0402"
  rect 0.5x0.6 smd: P$1(-0.55,0) P$2(0.55,0)
  body extent -0.8,-0.3 0.8,0.3, height 1.27
C0603 [mm] "C0603"
  rect 0.6x0.9 smd: P$1(-0.75,0) P$2(0.75,0)
  body extent -1.05,-0.45 1.05,0.45, height 1.27
C0805 [mm] "C0805"
  rect 0.7x1.3 smd: P$1(-0.95,0) P$2(0.95,0)
  body extent -1.3,-0.65 1.3,0.65, height 1.27
C1206 [mm] "C1206"
  rect 0.9x1.6 smd: P$1(-1.45,0) P$2(1.45,0)
  body extent -1.9,-0.8 1.9,0.8, height 1.27
C1206_NOBORDER [mm] "C1206_NOBORDER"
  rect 0.9x1.6 smd: P$1(-1.45,0) P$2(1.45,0)
  body extent -1.9,-0.8 1.9,0.8, height 1.27
D14 [mil] "D14"
  rect 78x22 smd: 1(-97,150) 2(-97,100) 3(-97,50) 4(-97,0) 5(-97,-50) 6(-97,-100) 7(-97,-150) 8(97,-150) 9(97,-100) 10(97,-50) 11(97,0) 12(97,50) 13(97,100) 14(97,150)
  body extent -136,-175 136,175, height 150
DO214AA [mm] "DO214AA"
  rect 1.8x2.2 smd: A(2.55,0) C(-2.55,0)
  body extent -3.45,-1.24 3.45,1.24, height 3.81
IND_1008_WE-PMI_WRE [mil] "IND_1008_WE-PMI_WRE"
  rect 46x87 smd: 1(-44,0) 2(44,0)
  body extent -67,-44 67,44, height 50
IND_BOURNS_SRN4018 [mil] "IND_BOURNS_SRN4018"
  rect 59x142 smd: 1(-60,0) 2(60,0)
  body extent -90,-71 89,71, height 50
JST_S3B-PH-SM4-TB(LF)(SN) [mm] "JST_S3B-PH-SM4-TB(LF)(SN)"
  rect 1x3.5 smd: 1(2,-2.98) 2(0,-2.98) 3(-2,-2.98)
  rect 1.5x3.4 smd: S1(-4.35,2.57) S2(4.35,2.57)
  body extent -5.1,-4.73 5.1,4.27, height 1.27
JST_S6B-ZR-SM4A-TF(LF)(SN) [mm] "JST_S6B-ZR-SM4A-TF(LF)(SN)"
  rect 0.7x1.4 smd: 1(3.75,0) 2(2.25,0) 3(0.75,0) 4(-0.75,0) 5(-2.25,0) 6(-3.75,0)
  rect 1.1x1.9 smd: P1(5.7,3.75) P2(-5.7,3.75)
  body extent -6.25,-0.7 6.25,4.7, height 1.27
JST_SM06B-GHS-TB(LF)(SN) [mm] "JST_SM06B-GHS-TB(LF)(SN)"
  rect 0.6x1.7 smd: 1(-3.125,1.85) 2(-1.875,1.85) 3(-0.625,1.85) 4(0.625,1.85) 5(1.875,1.85) 6(3.125,1.85)
  rect 1x2.7 smd: S1(4.975,-1.35) S2(-4.975,-1.35)
  Top keep-out lines w0.05: -3.675,2.95 -3.675,1.85 -5.725,1.85 -5.725,-2.95 5.725,-2.95 5.725,1.85 3.675,1.85 3.675,2.95 -3.675,2.95
  body extent -5.75,-2.98 5.75,2.98, height 3.81
JST_SM07B-GHS-TB(LF)(SN) [mm] "JST_SM07B-GHS-TB(LF)(SN)"
  rect 0.6x1.7 smd: 1(-3.75,1.85) 2(-2.5,1.85) 3(-1.25,1.85) 4(0,1.85) 5(1.25,1.85) 6(2.5,1.85) 7(3.75,1.85)
  rect 1x2.7 smd: S1(5.6,-1.35) S2(-5.6,-1.35)
  Top keep-out lines w0.05: 6.35,1.85 6.35,-2.95 -6.35,-2.95 -6.35,1.85 -4.3,1.85 -4.3,2.95 4.3,2.95 4.3,1.85 6.35,1.85
  body extent -6.38,-2.98 6.38,2.98, height 3.81
JST_SM08B-GHS-TB(LF)(SN) [mm] "JST_SM08B-GHS-TB(LF)(SN)"
  rect 0.6x1.7 smd: 1(-4.375,0) 2(-3.125,0) 3(-1.875,0) 4(-0.625,0) 5(0.625,0) 6(1.875,0) 7(3.125,0) 8(4.375,0)
  rect 1x2.7 smd: SH1(-6.225,-3.2) SH2(6.225,-3.2)
  Top keep-out lines w0.05: 6.975,0 6.975,-4.8 5.475,-4.8 5.475,-4.55 -5.475,-4.55 -5.475,-4.8 -6.975,-4.8 -6.975,0 -4.925,0 -4.925,1.1 4.925,1.1 4.925,0 6.975,0
  body extent -7,-4.83 7,1.13, height 3.81
LED0603 [mil] "LED0603"
  rect 31.5x31.5 smd: ANODE(29.53,0) CATHODE(-29.53,0)
  body extent -45,-16 45,16, height 50
M2.5MOUNT [mm] "M2.5MOUNT"
  round 3.9 hole 2.6: P$1(0,0)
  Top region: -2.464,0 -2.276,0.943 -1.742,1.742 -0.943,2.276 0,2.464 0,2.464 0.943,2.276 1.742,1.742 2.276,0.943 2.464,0 2.464,0 2.276,-0.943 1.742,-1.742 0.943,-2.276 0,-2.464 0,-2.464 -0.943,-2.276 -1.742,-1.742 -2.276,-0.943 -2.464,0
  Top keep-out region: -2.564,0 -2.368,0.981 -1.813,1.813 -0.981,2.368 0,2.564 0,2.564 0.981,2.368 1.813,1.813 2.368,0.981 2.564,0 2.564,0 2.368,-0.981 1.813,-1.813 0.981,-2.368 0,-2.564 0,-2.564 -0.981,-2.368 -1.813,-1.813 -2.368,-0.981 -2.564,0
  Bottom region: -2.464,0 -2.276,0.943 -1.742,1.742 -0.943,2.276 0,2.464 0,2.464 0.943,2.276 1.742,1.742 2.276,0.943 2.464,0 2.464,0 2.276,-0.943 1.742,-1.742 0.943,-2.276 0,-2.464 0,-2.464 -0.943,-2.276 -1.742,-1.742 -2.276,-0.943 -2.464,0
  body extent -2.5,-2.5 2.5,2.5, height 3.81
M1206 [mm] "M1206"
  rect 1.6x2 smd: 1(-1.4,0) 2(1.4,0)
  Top keep-out lines w0.051: -2.473,1.483 -2.473,-1.483 2.473,-1.483 2.473,1.483 -2.473,1.483
  body extent -2.5,-1.51 2.5,1.51, height 3.81
PH2X4 [mil] "PH2X4"
  round 40 hole 25.59: P$1(0,0) P$2(50,0) P$3(0,-50) P$4(50,-50) P$5(0,-100) P$6(50,-100) P$7(0,-150) P$8(50,-150)
  body extent -20,-170 70,20, height 50
QFN50P700X700X60-49N [mm] "QFN50P700X700X60-49N"
  rect 0.85x0.3 smd: 1(-3.45,2.75) 2(-3.45,2.25) 3(-3.45,1.75) 4(-3.45,1.25) 5(-3.45,0.75) 6(-3.45,0.25) 7(-3.45,-0.25) 8(-3.45,-0.75) 9(-3.45,-1.25) 10(-3.45,-1.75) 11(-3.45,-2.25) 12(-3.45,-2.75) 25(3.45,-2.75) 26(3.45,-2.25) 27(3.45,-1.75) 28(3.45,-1.25) 29(3.45,-0.75) 30(3.45,-0.25) 31(3.45,0.25) 32(3.45,0.75) 33(3.45,1.25) 34(3.45,1.75) 35(3.45,2.25) 36(3.45,2.75)
  rect 0.3x0.85 smd: 13(-2.75,-3.45) 14(-2.25,-3.45) 15(-1.75,-3.45) 16(-1.25,-3.45) 17(-0.75,-3.45) 18(-0.25,-3.45) 19(0.25,-3.45) 20(0.75,-3.45) 21(1.25,-3.45) 22(1.75,-3.45) 23(2.25,-3.45) 24(2.75,-3.45) 37(2.75,3.45) 38(2.25,3.45) 39(1.75,3.45) 40(1.25,3.45) 41(0.75,3.45) 42(0.25,3.45) 43(-0.25,3.45) 44(-0.75,3.45) 45(-1.25,3.45) 46(-1.75,3.45) 47(-2.25,3.45) 48(-2.75,3.45)
  rect 5.7x5.7 smd paste+0: 49(0,0)
  body extent -3.88,-3.88 3.88,3.88, height 3.81
R0402 [mm] "R0402"
  rect 0.5x0.6 smd: P$1(-0.55,0) P$2(0.55,0)
  body extent -0.8,-0.3 0.8,0.3, height 1.27
R0805 [mm] "R0805"
  rect 0.7x1.3 smd: P$1(-0.95,0) P$2(0.95,0)
  body extent -1.3,-0.65 1.3,0.65, height 1.27
SHORT_TOP-50 [mil] "SHORT_TOP-50"
  rect 10x10 smd paste+0 mask+0: 1(5,0) 2(-5,0)
  body extent -10,-5 10,5, height 50
SHORT_TOP-MEDIUM [mil] "SHORT_TOP-MEDIUM"
  rect 25x25 smd paste+0 mask+0: 1(12.5,0) 2(-12.5,0)
  body extent -25,-12 25,12, height 50
SODFL1608X70N [mil] "SODFL1608X70N"
  rect 21.65x16.54 smd: 1(-31.5,0) 2(31.5,0)
  body extent -49,-25 49,25, height 150
SOIC8 [mil] "SOIC8"
  rect 61x24 smd: 1(-106.3,75) 2(-106.3,25) 3(-106.3,-25) 4(-106.3,-75) 5(106.3,-75) 6(106.3,-25) 7(106.3,25) 8(106.3,75)
  Top keep-out region: -149.8,-100 -149.8,100 -90,100 -90,109.5 90,109.5 90,100 149.8,100 149.8,-100 90,-100 90,-109.5 -90,-109.5 -90,-100
  Top keep-out lines w6: 87,-106 -87,-106 -87,-97 -147,-97 -147,97 -87,97 -87,106 87,106 87,97 147,97 147,-97 87,-97 87,-106
  body extent -150,-109 150,109, height 150
SOP_ADVANCE_8 [mm] "SOP_ADVANCE_8"
  rect 0.85x1.35 smd: 1(-1.905,-2.9) 2(-0.635,-2.9) 3(0.635,-2.9) 4(1.905,-2.9)
  rect 0.85x1 smd: 5(1.925,2.7) 6(0.638,2.7) 7(-0.638,2.7) 8(-1.925,2.7)
  rect 4.7x3.8 smd: PAD(0,0.35)
  body extent -2.35,-3.57 2.35,3.2, height 1.27
SOP_ADVANCE_8_VIAS [mm] "SOP_ADVANCE_8_VIAS"
  rect 0.85x1.35 smd: 1(-1.905,-2.9) 2(-0.635,-2.9) 3(0.635,-2.9) 4(1.905,-2.9)
  rect 0.85x1 smd: 5(1.925,2.7) 6(0.638,2.7) 7(-0.638,2.7) 8(-1.925,2.7)
  rect 4.7x3.8 smd paste+0: PAD(0,0.35)
  body extent -2.35,-3.57 2.35,3.2, height 3.81
TSSOP14 [mil] "TSSOP14"
  rect 12x39 smd: 1(-76.77,-114.87) 2(-51.18,-114.87) 3(-25.59,-114.87) 4(0,-114.87) 5(25.59,-114.87) 6(51.18,-114.87) 7(76.77,-114.87) 8(76.77,114.87) 9(51.18,114.87) 10(25.59,114.87) 11(0,114.87) 12(-25.59,114.87) 13(-51.18,114.87) 14(-76.77,114.87)
  body extent -83,-134 83,134, height 50
WQFN-40 [mm] "WQFN-40"
  rrect50% 0.22x0.6 smd: 1(2.25,2.9) 2(1.75,2.9) 3(1.25,2.9) 4(0.75,2.9) 5(0.25,2.9) 6(-0.25,2.9) 7(-0.75,2.9) 8(-1.25,2.9) 9(-1.75,2.9) 10(-2.25,2.9) 21(-2.25,-2.9) 22(-1.75,-2.9) 23(-1.25,-2.9) 24(-0.75,-2.9) 25(-0.25,-2.9) 26(0.25,-2.9) 27(0.75,-2.9) 28(1.25,-2.9) 29(1.75,-2.9) 30(2.25,-2.9)
  rrect50% 0.6x0.22 smd: 11(-2.9,2.25) 12(-2.9,1.75) 13(-2.9,1.25) 14(-2.9,0.75) 15(-2.9,0.25) 16(-2.9,-0.25) 17(-2.9,-0.75) 18(-2.9,-1.25) 19(-2.9,-1.75) 20(-2.9,-2.25) 31(2.9,-2.25) 32(2.9,-1.75) 33(2.9,-1.25) 34(2.9,-0.75) 35(2.9,-0.25) 36(2.9,0.25) 37(2.9,0.75) 38(2.9,1.25) 39(2.9,1.75) 40(2.9,2.25)
  rect 4.15x4.15 smd paste+0: PAD(0,0)
  body extent -3.2,-3.2 3.2,3.2, height 3.81
XT30PW_MALE [mm] "XT30PW_MALE"
  round 3 hole 2: 1(-2.5,0) 2(2.5,0)
  round 1.875 hole 1.25: M1(-5.5,10) M2(5.5,10)
  body extent -6.45,-1.51 6.45,10.95, height 1.27

## Part data
A B C VN VP: library part 16AWG_TERM, PackageName=16AWG_TERM
AUX1: library part JST_SM08B-GHS-TB(LF)(SN), PackageName=JST_SM08B-GHS-TB(LF)(SN)
AUX2: library part JST_SM07B-GHS-TB(LF)(SN), PackageName=JST_SM07B-GHS-TB(LF)(SN)
AUX2H: library part PH2X4, PackageName=PH2X4
C1 C5 C7 C8 C9 C11 C12 C14 C15 C16 C19 C20 C21 C22 C23 C25 C26 C27 C28 C29 C30 C31 C32 C33 C34 C35 C36 C41 C42 C87: library part C0402, PackageName=C0402
C2 C43: library part C0805, PackageName=C0805
C3 C10 C17 C18 C23\ C24 C37 C38 C39 C40: library part C0603, PackageName=C0603
C4 C6 C13 C44 C45 C46 C47 C48: library part C1206, PackageName=C1206
C49 C50 C51 C52 C53 C54 C55 C56 C57 C58 C59 C60 C61 C62 C63 C64 C65 C66 C67 C68 C69 C70 C71 C72 C73 C74 C75 C76 C77 C78 C79 C80 C81 C82 C83 C84 C85 C86: library part C1206_NOBORDER, PackageName=C1206_NOBORDER
CAN1 CAN2: library part JST_S3B-PH-SM4-TB(LF)(SN), PackageName=JST_S3B-PH-SM4-TB(LF)(SN)
CAN_DBG: library part 1X3, PackageName=1X3
D1 D2: library part LED0603, PackageName=LED0603
D3 D4 D5 D6 D7 D8 D9 D10 D11 D13 D14 D15 D16: library part SODFL1608X70N, PackageName=SODFL1608X70N
D12: library part DO214AA, PackageName=DO214AA
D33 D50 DAC DG1 DTR DTX: library part 24AWG_PAD, PackageName=24AWG_PAD
J1 J2: library part XT30PW_MALE, PackageName=XT30PW_MALE
J3: library part JST_SM06B-GHS-TB(LF)(SN), PackageName=JST_SM06B-GHS-TB(LF)(SN)
L1: library part IND_BOURNS_SRN4018, PackageName=IND_BOURNS_SRN4018
L2: library part IND_1008_WE-PMI_WRE, PackageName=IND_1008_WE-PMI_WRE
M1 M2 M3 M4: library part M2.5MOUNT, PackageName=M2.5MOUNT
Q1 Q3 Q5: library part SOP_ADVANCE_8_VIAS, PackageName=SOP_ADVANCE_8_VIAS
Q2 Q4 Q6: library part SOP_ADVANCE_8, PackageName=SOP_ADVANCE_8
R1 R2 R3 R4 R5 R6 R7 R8 R9 R10 R11 R12 R13 R14 R15 R16 R17 R18 R19 R20 R21 R22 R23 R24 R25 R26 R27 R28 R30 R31 R32 R33 R34 R35 R36 R38 R39 R40: library part R0402, PackageName=R0402
R29 R37: library part R0805, PackageName=R0805
RA RB RC: library part M1206, PackageName=M1206
SH1 SH2 SH3: library part SHORT_TOP-50, PackageName=SHORT_TOP-50
SH4: library part SHORT_TOP-MEDIUM, PackageName=SHORT_TOP-MEDIUM
SWD: library part JST_S6B-ZR-SM4A-TF(LF)(SN), PackageName=JST_S6B-ZR-SM4A-TF(LF)(SN)
TEMP: library part 1X2, PackageName=1X2
U1: library part 21-0487A_MXM, PackageName=21-0487A_MXM
U2: library part BGA9C50P3X3_165X187X66, PackageName=BGA9C50P3X3_165X187X66
U3: library part QFN50P700X700X60-49N, PackageName=QFN50P700X700X60-49N
U4: library part SOIC8, PackageName=SOIC8
U5: library part TSSOP14, PackageName=TSSOP14
U7: library part WQFN-40, PackageName=WQFN-40
U8: library part D14, PackageName=D14

## Via types
v1: diameter 0.559/0.559/0.559/0.559 (per signal layer), hole 0.254, Top to Bottom, 469 vias
v2: diameter 0.655/0.655/0.655/0.655 (per signal layer), hole 0.35, Top to Bottom, 10 vias

## Nets (pads, with @x,y where several pads share a name; then routed paths per layer and width w, separated by ;. In a path a pad name is that pad's centre, name@x,y a point inside that pad or via, vN(x,y) a via of type N, cw(c..) or ccw(c..) an arc to the next point about the centre after c; other vN are vias at no path point)
+3V3: AUX1.2 AUX2.2 AUX2H.P$4 C6.P$1 C7.P$1 C8.P$1 C10.P$1 C11.P$1 C12.P$1 C13.P$2 C15.P$1 C16.P$1 C18.P$1 C23.P$1 C24.P$1 C30.P$1 C42.P$2 C87.P$1 D33.P$1 L2.1 R2.P$2 R17.P$1 R20.P$1 R21.P$1 R25.P$1 R26.P$1 R40.P$2 SWD.6 TEMP.1 U2.C2 U3.1 U3.20 U3.21 U3.23 U3.35 U3.48 U4.5 U5.12 U7.24 U8.13 U8.14 | length 55.2
  Top w0.2: U7.24@25.91,22.419 26.369,21.96 C42.P$2@26.91,21.96
  Top w0.384: AUX2.2@18.9,41.15 18.96,41.21 v1(19.36,41.21) ; C42.P$2@26.91,21.96 26.96,22.01 v1(27.3,22.01) ; R26.P$1@38.96,27.14 39.06,27.04 v1(39.71,27.04) ; v1(44.5,19.5) 44.04,19.96 U8.13@44.04,20.036 ; v1(44.5,20.2) 44.336,20.036 U8.13@44.04,20.036 ; C30.P$1@45.25,18.5 45.31,18.56 U8.14@45.31,20.036 45.31,21.47 44.01,21.47 44.01,20.066 U8.13@44.04,20.036
  Top w0.5: v1(27.9,8.9) 28.7,9.7 v1(28.7,15.1) 28.7,15.6 29,15.9 30.8,15.9 v1(30.9,16)
  Bottom w0.152: R17.P$1@12.16,36.45 12.16,36.62 12.61,37.07 13.37,37.07 13.588,37.288 13.588,39.519 14.024,39.955 16.976,39.955 17.475,39.456 17.475,38.156 17.926,37.705 21.3,37.705 22.18,38.585 v1(22.18,39.59)
  Bottom w0.2: v1@27.31,35.15 C12.P$1@27.31,35.72
  Bottom w0.25: U3.35@34.44,35.39 34.494,35.444 34.494,36.193 v1(34.65,36.35) 34.87,36.57 C8.P$1@34.87,36.87
  Bottom w0.254: C11.P$1@26.86,34.94 26.86,33.8 27.224,33.437 28.023,33.437 28.269,33.191 U3.21@28.74,33.19 ; v1@27.31,35.15 28.27,34.19 U3.23@28.74,34.19
  Bottom w0.305: C15.P$1@27.14,22.42 27.27,22.42 R40.P$2@28.05,23.2
  Bottom w0.384: U5.12@25.918,22.35 27.07,22.35 C15.P$1@27.14,22.42 27.3,22.26 v1(27.3,22.01) ; v1(26.99,35.35) 26.99,35.4 C12.P$1@27.31,35.72 ; C10.P$1@27.41,32.91 C10.P$1@27.51,32.81 ; U3.1@34.94,28.49 35.36,28.49 v1(35.71,28.84) ; U3.48@35.64,29.19 35.71,29.12 v1(35.71,28.84) ; R25.P$1@35.96,25.84 36.5,26.38 v1(37.09,26.38) ; C7.P$1@36.16,28.38 36.16,28.39 v1(35.71,28.84) ; U2.C2@42.6,19.8 44.1,19.8 v1(44.5,20.2)
  Bottom w0.406: C87.P$1@26.08,33.27 C87.P$1@26.08,33.07 26.087,33.063 v1@26.857,33.063
  Bottom w0.5: R20.P$1@27.15,8.9 v1(27.9,8.9) R21.P$1@28.35,8.9 ; v1(28.7,15.1) R2.P$2@28.7,15.75
  Bottom w0.508: v1(25.89,33.46) C87.P$1@26.08,33.27 ; v1@26.857,33.063 27.009,32.91 C10.P$1@27.41,32.91
  other v1: 31.5,16 38.7,22.4 39.3,22.4 40.6,22.4 27.9,32.78 26.68,33.12 26.88,33.97 27.49,34.95 41.09,37.35 41.09,38.05 41.09,38.75 34.65,40.55 19.36,40.62 33.73,41.11 34.65,41.15 33.72,41.72 34.65,41.75 19.36,41.81 19,43 19.6,43
+5V: AUX1.1 AUX2.1 AUX2H.P$2 C4.P$1 C5.P$1 C14.P$1 C17.P$1 C23\.P$1 D50.P$1 J3.1 L1.1 R39.P$2 U1.4 U2.A2 U2.A3 U4.3 | length 96.2
  Top w0.254: v1(40.418,8.5) 40.993,9.075 J3.1@41.15,9.075
  Top w0.384: v2(32.8,21.1) 32.765,21.135 U4.3@32.765,22.7 32.85,22.785 C14.P$1@32.85,24.1
  Route15 w0.384: AUX2H.P$2@8.47,45.2 8.492,45.554 21.446,45.554 22.6,44.4 ; v2(21.4,41.7) 21.4,43.2 22.6,44.4 ; v2(36.9,42.2) 36,43.1 36,43.3 ; v1(43.8,15.8) 43.8,16.29 45.2,17.69 45.2,38.8 43.4,40.6 41.9,40.6 40.4,42.1 40.4,44.7 39.9,45.2 37.9,45.2 36,43.3 ; 22.6,44.4 32.8,44.4 33.9,43.3 36,43.3
  Bottom w0.254: D50.P$1@37.1,15.7 38.2,14.6 38.2,12.295 37.7,11.795 37.7,10.3 38.3,9.7 40.1,9.7 40.418,9.382 v1(40.418,8.5) 40.571,8.653 40.571,9.166 40.65,9.245 U1.4@40.65,9.647 ; L1.1@43,16.324 43.9,17.224 R39.P$2@43.9,17.65
  Bottom w0.384: v2(32.8,21.1) 35.3,18.6 35.3,16.2 35.8,15.7 D50.P$1@37.1,15.7
  other v2: 21.4,40.5 20.8,41.1 36.2,41.5 36.9,41.5
AS5047_CS: U3.19 U5.1 | length 17.8
  Bottom w0.152: U5.1@20.082,21.05 20.946,21.05 22.014,22.118 22.014,26.366 24.515,28.866 24.515,31.7 25.405,32.59 26.647,32.59 26.975,32.261 28.149,32.261 28.22,32.19 U3.19@28.74,32.19
AUX1_A: C29.P$1 R10.P$2 U3.13 U3.27 U5.2 | length 55.6
  Route15 w0.152: v1(28.2,28.7) 28.2,28.134 28.216,28.118 28.216,27.616 27.029,26.429 27.029,24.325 29.132,22.222 v1(29.132,21.722)
  Bottom w0.152: v1(28.2,28.7) 28.25,28.7 U3.13@28.74,29.19 ; v1(29.132,21.722) 29.132,21.532 28.414,20.815 27.084,20.815 26.669,20.4 19.6,20.4 19.3,20.7 19.3,21.4 19.6,21.7 U5.2@20.082,21.7 20.865,21.7 21.71,22.544 21.71,26.548 24.21,29.048 24.21,33.52 24.855,34.165 24.855,35.485 26.67,37.3 28.1,37.3 30.2,39.4 31.9,39.4 ; U3.27@30.44,35.39 30.44,37.872 31.9,39.332 31.9,39.4 ; R10.P$2@32.7,42.75 31.9,41.95 31.9,39.4
  Bottom w0.5: R10.P$2@32.7,42.75 C29.P$1@32.7,43.85
AUX1_B: C28.P$1 R11.P$2 U3.42 U5.3 | length 46
  Top w0.152: v1(31.2,39.908) 31.703,39.405 35.526,39.405 38.062,36.869 38.062,35.069 39.15,33.981 39.15,31.566 v1(39.228,31.488)
  Bottom w0.152: U5.3@20.082,22.35 20.684,22.35 21.405,23.071 21.405,26.674 23.905,29.174 23.905,33.646 24.52,34.261 24.52,35.581 26.544,37.605 27.974,37.605 30.274,39.905 30.7,39.905 ; v1(31.2,39.908) 31.197,39.905 30.7,39.905 ; R11.P$2@31.37,42.75 30.7,42.08 30.7,39.905 ; U3.42@35.64,32.19 37.11,32.19 37.812,31.488 v1(39.228,31.488)
  Bottom w0.5: R11.P$2@31.37,42.75 C28.P$1@31.37,43.85
AUX1_C: C27.P$1 R12.P$2 U3.15 U5.4 | length 35.1
  Route15 w0.152: v1(23.7,34.27) 24.43,34.27 25.15,33.55 25.15,30.91 v1(26.07,29.99)
  Bottom w0.152: U5.4@20.082,23 20.5,23 21.1,23.6 21.1,26.8 23.6,29.3 23.6,34.17 v1(23.7,34.27) 23.7,35.2 26.41,37.91 27.848,37.91 29.381,39.443 29.381,42.022 R12.P$2@30.11,42.75 ; v1(26.07,29.99) 26.39,30.31 26.49,30.31 27.2,29.6 27.73,29.6 28.199,30.069 28.619,30.069 U3.15@28.74,30.19
  Bottom w0.5: C27.P$1@30.1,43.85 30.1,42.76 R12.P$2@30.11,42.75
AUX1_D: C26.P$1 DTR.P$1 R13.P$2 R34.P$2 U3.38 U8.2 | length 44.6
  Top w0.152: v1(28.51,39.29) 29.42,38.38 30.98,38.38 31.395,38.795 35.273,38.795 37.452,36.616 37.452,34.482 v1(37.686,34.248) ; DTR.P$1@36.5,21.6 41.399,21.6 43.978,24.179 43.978,24.902 U8.2@44.04,24.964 44.04,25.587 42.971,26.655 42.971,33.729 v1(42.5,34.2)
  Bottom w0.152: v1@28.42,39.2 v1(28.51,39.29) 28.1,39.7 28.1,42.05 R13.P$2@28.8,42.75 ; U3.38@35.64,34.19 37.628,34.19 v1(37.686,34.248) 38.875,34.248 38.89,34.234 42.466,34.234 v1(42.5,34.2)
  Bottom w0.348: R34.P$2@27.95,39.2 v1@28.42,39.2
  Bottom w0.5: R13.P$2@28.8,42.75 C26.P$1@28.8,43.86
AUX1_E: C25.P$1 DTX.P$1 R14.P$2 R33.P$2 U3.41 U3.47 U8.5 | length 46.3
  Top w0.152: v1(27.4,39.811) 27.402,39.809 27.402,39.398 28.725,38.075 31.106,38.075 31.521,38.49 35.14,38.49 37.148,36.483 37.148,32.86 v1(37.308,32.7) ; DTX.P$1@36.5,23.6 37.1,23 39.3,23 40.23,23.93 U8.5@40.23,24.964 40.23,25.93 41.24,26.94 ; v1(39.229,28.951) 41.24,26.94 ; v1(41.8,31.8) 41.5,31.5 41.5,27.2 41.24,26.94
  Bottom w0.152: v1(27.4,39.811) v1@27.45,39.861 ; R33.P$2@27.45,40.5 26.9,41.05 26.9,42.15 R14.P$2@27.5,42.75 ; U3.47@35.64,29.69 36.11,29.69 36.849,28.951 v1(39.229,28.951) ; U3.41@35.64,32.69 37.298,32.69 v1(37.308,32.7) 37.868,32.14 41.46,32.14 v1(41.8,31.8)
  Bottom w0.348: v1@27.45,39.861 R33.P$2@27.45,40.5
  Bottom w0.5: R14.P$2@27.5,42.75 27.5,43.84 C25.P$1@27.51,43.85
AUX1_I2C_PULLUP: D13.2 D14.2 U3.46 | length 25.1
  Top w0.152: v1(27.442,38.547) 28.234,37.755 31.217,37.755 31.648,38.186 35.011,38.186 36.8,36.397 36.8,31.44 37.338,30.902 37.338,30.47 37.102,30.234 36.522,30.234 v1(36.414,30.126)
  Bottom w0.152: D13.2@23.4,41.7 D14.2@23.4,40.4 24,39.8 25.5,39.8 25.9,39.4 25.9,38.8 26.1,38.6 27.389,38.6 v1(27.442,38.547) ; U3.46@35.64,30.19 36.35,30.19 v1(36.414,30.126)
AUX1P_A: AUX1.3 R10.P$1 | length 1
  Top w0.384: v1(32.508,41.2) 32.558,41.15 AUX1.3@32.975,41.15
  Bottom w0.384: v1(32.508,41.2) 32.508,41.458 R10.P$1@32.7,41.65
AUX1P_B: AUX1.4 R11.P$1 | length 1.1
  Top w0.384: v1(31.208,41.2) 31.258,41.15 AUX1.4@31.725,41.15
  Bottom w0.384: v1(31.208,41.2) 31.208,41.488 R11.P$1@31.37,41.65
AUX1P_C: AUX1.5 R12.P$1 | length 1
  Top w0.384: v1(29.99,41.2) 30.039,41.15 AUX1.5@30.475,41.15
  Bottom w0.384: v1(29.99,41.2) 29.99,41.53 R12.P$1@30.11,41.65
AUX1P_D: AUX1.6 R13.P$1 | length 1
  Top w0.384: v1(28.707,41.2) 28.757,41.15 AUX1.6@29.225,41.15
  Bottom w0.384: v1(28.707,41.2) 28.707,41.557 R13.P$1@28.8,41.65
AUX1P_E: AUX1.7 R14.P$1 | length 0.9
  Top w0.384: v1(27.592,41.232) 27.893,41.232 AUX1.7@27.975,41.15
  Bottom w0.384: R14.P$1@27.5,41.65 27.5,41.324 v1(27.592,41.232)
AUX2_A: C22.P$1 R4.P$2 U3.6 | length 26
  Top w0.152: v1(20.422,38.5) 20.422,37.859 22.915,35.367 23.322,35.367 25.345,33.343 25.345,33.286 26.045,32.587 27.281,32.587 28.958,30.911 28.958,30.844 32.211,27.59 v1(32.478,27.59)
  Bottom w0.152: C22.P$1@18.55,45 18.35,45 17.9,44.55 17.9,43.55 R4.P$2@17.8,43.45 17.873,43.45 18.329,42.995 18.329,40.701 20.422,38.607 v1(20.422,38.5) ; U3.6@32.44,28.49 32.478,28.452 v1(32.478,27.59)
AUX2_B: C21.P$1 R5.P$2 R6.P$2 U3.5 U3.32 | length 44.5
  Top w0.152: v1(32.89,26.979) 31.952,26.979 28.315,30.616 27.181,30.616 24.602,33.195 24.056,33.195 19.711,37.54 v1(19.711,38.5) 19.711,38.711 20.035,39.034 20.834,39.034 23.028,36.841 32.737,36.841 33.12,36.458 v1(33.12,36.428)
  Bottom w0.152: C21.P$1@16.25,44.5 16.25,45.2 R6.P$2@16.45,45.4 ; R5.P$2@16.5,43.45 17.1,42.85 17.1,41.419 18.908,39.611 18.908,39.603 19.711,38.8 v1(19.711,38.5) ; v1(32.89,26.979) 33.016,27.105 33.016,28.414 U3.5@32.94,28.49 ; U3.32@32.94,35.39 33,35.45 33,36.207 33.12,36.328 v1(33.12,36.428)
  Bottom w0.384: C21.P$1@16.25,44.5 16.5,44.25 R5.P$2@16.5,43.45
AUX2_C: C20.P$1 R7.P$2 R9.P$2 U3.16 U3.33 | length 42.7
  Top w0.152: v1(27.48,30.108) 27.252,30.108 24.469,32.89 23.93,32.89 19,37.821 v1(19,38.5) 19,38.9 19.44,39.34 20.96,39.34 23.154,37.146 33.377,37.146 33.591,36.931 v1(33.631,36.931)
  Bottom w0.152: R7.P$2@15.16,41 14.863,41.297 14.863,42.913 R9.P$2@15.4,43.45 15.929,42.921 15.929,40.871 16.101,40.699 17.381,40.699 19,39.08 v1(19,38.5) ; v1(27.48,30.108) 27.76,30.108 28.342,30.69 U3.16@28.74,30.69 ; U3.33@33.44,35.39 33.44,35.79 33.631,35.981 v1(33.631,36.931)
  Bottom w0.384: C20.P$1@15.35,44.5 15.4,44.45 R9.P$2@15.4,43.45
AUX2_D: C19.P$1 R8.P$2 U3.45 | length 36.8
  Top w0.152: v1(18.2,38.5) 18.2,38.189 23.804,32.586 24.343,32.586 26.972,29.957 26.972,29.898 27.565,29.305 27.565,29.3 29.2,29.3 32.029,26.471 33.1,26.471 35.2,28.571 35.2,29.631 36.311,30.742 v1(36.774,30.742)
  Bottom w0.152: R8.P$2@13.3,43.45 14.549,42.201 14.549,40.651 14.9,40.3 17.3,40.3 18.2,39.4 v1(18.2,38.5) ; U3.45@35.64,30.69 36.722,30.69 v1(36.774,30.742)
  Bottom w0.384: C19.P$1@13.25,44.5 13.3,44.45 R8.P$2@13.3,43.45
AUX2_I2C_PULLUP: D15.2 D16.2 U3.34 | length 30.5
  Top w0.152: v1(11.125,41.754) 11.125,41.154 12.635,39.644 21.156,39.644 23.35,37.451 33.895,37.451 33.908,37.437 v1(34.131,37.437)
  Bottom w0.152: D15.2@10.8,43.8 11.125,43.475 v1(11.125,41.754) 11.479,41.4 D16.2@12,41.4 ; U3.34@33.94,35.39 33.94,36.07 34.14,36.27 34.14,37.428 v1(34.131,37.437)
AUX2P_A: AUX2.3 AUX2H.P$7 AUX2H.P$8 R4.P$1 | length 13.6
  Top w0.152: AUX2.3@17.608,41.192 AUX2.3@17.65,41.15
  Top w0.348: AUX2.3@17.608,41.192 v1(17.608,42.747)
  Route2 w0.152: AUX2H.P$7@7.2,41.39 AUX2H.P$8@8.47,41.39 8.626,41.234 12.172,41.234 13.295,42.358 14.872,42.358 15.587,43.073 16.023,43.073 16.226,43.276 16.647,43.276 17.176,42.747 v1(17.608,42.747)
  Bottom w0.152: v1(17.608,42.747) 17.8,42.555 R4.P$1@17.8,42.35
AUX2P_B: AUX2.4 AUX2H.P$5 R5.P$1 | length 15.3
  Top w0.152: v1@16.4,42.732 v1(16.437,42.768)
  Top w0.348: AUX2.4@16.4,41.15 v1@16.4,42.732
  Route2 w0.152: AUX2H.P$5@7.2,42.66 6.8,42.66 6.4,42.26 6.4,41.1 6.83,40.67 12.039,40.67 13.422,42.053 14.998,42.053 15.713,42.768 v1(16.437,42.768)
  Bottom w0.152: v1(16.437,42.768) 16.5,42.705 R5.P$1@16.5,42.35
AUX2P_C: AUX2.5 AUX2H.P$3 R9.P$1 | length 15
  Top w0.348: AUX2.5@15.15,41.15 15.412,41.412 v1(15.412,41.748)
  Route2 w0.152: AUX2H.P$3@7.2,43.93 6.095,42.825 6.095,40.786 6.516,40.365 12.165,40.365 12.705,40.905 12.904,40.905 13.748,41.748 v1(15.412,41.748)
  Bottom w0.152: R9.P$1@15.4,42.35 15.412,42.338 v1(15.412,41.748)
AUX2P_D: AUX2.6 AUX2H.P$1 R8.P$1 | length 15.7
  Top w0.152: AUX2.6@13.9,41.118 AUX2.6@13.9,41.15
  Top w0.348: v1(13.382,40.6) AUX2.6@13.9,41.118
  Route2 w0.152: AUX2H.P$1@7.2,45.2 5.79,43.79 5.79,40.659 6.39,40.06 12.36,40.06 12.9,40.6 v1(13.382,40.6)
  Bottom w0.152: R8.P$1@13.3,42.35 13.382,42.268 v1(13.382,40.6)
CAN_N: CAN1.2 CAN2.2 CAN_DBG.2 R37.P$2 U4.6 | length 53.3
  Top w0.216: CAN1.2@19.8,7.58 19.7,6.8 18.9,6 18.9,5.3 19.3,4.9 23.78,4.9 v2(24,5.119) ; v1(32.74,14.97) 33.202,14.97 33.232,15 ; U4.6@32.765,17.3 32.765,16.093 33.232,15.627 33.232,15 ; v1(33.8,9.8) 33.8,9.9 34.1,10.2 34.1,10.879 33.432,11.547 33.432,14.547 33.232,14.747 33.232,15
  Bottom w0.216: CAN_DBG.2@9,2.7 8.168,1.868 8.168,1.453 8.653,0.968 20.947,0.968 21.932,1.952 21.932,3.952 22.547,4.568 23.425,4.568 23.757,4.9 23.78,4.9 v2(24,5.119) 24.219,4.9 33.6,4.9 34.1,5.4 34.1,5.99 33.3,6.79 CAN2.2@33.4,7.58 33.3,8.391 33.694,8.993 33.685,9.685 v1(33.8,9.8) ; R37.P$2@32.45,15.7 32.45,15.26 v1(32.74,14.97)
CAN_P: CAN1.1 CAN2.1 CAN_DBG.1 R37.P$1 U4.7 | length 55.3
  Top w0.216: CAN1.1@17.8,7.58 17.7,6.8 18.5,6 18.5,5.179 19.148,4.532 23.78,4.532 v2(24,4.312) ; U4.7@34.035,17.3 34.035,16.093 33.6,15.659 33.6,14.9 ; v1(34.2,15) 33.7,15 33.6,14.9 ; v1(34.811,9.8) 34.74,9.871 34.74,9.924 34.468,10.195 34.468,11.032 33.8,11.7 33.8,14.7 33.6,14.9
  Bottom w0.216: CAN_DBG.1@7,2.7 7.8,1.9 7.8,1.3 8.5,0.6 21.2,0.6 22.3,1.7 22.3,3.8 22.7,4.2 23.888,4.2 v2(24,4.312) 24.219,4.532 33.853,4.532 34.518,5.197 34.518,5.998 35.3,6.78 CAN2.1@35.4,7.58 34.9,7.98 34.9,9.711 v1(34.811,9.8) ; v1(34.2,15) 34.35,15.15 R37.P$1@34.35,15.7
CAN_RX: U3.43 U4.4 | length 20.8
  Top w0.152: U4.4@31.495,22.7 31.495,21.653 31.674,21.474 31.974,21.474 v1(32,21.5)
  Bottom w0.152: v1(32,21.5) 33,22.5 34.2,22.5 36.595,24.895 36.815,24.895 40.9,28.98 40.9,30.26 40.18,30.98 37.7,30.98 36.99,31.69 U3.43@35.64,31.69
CAN_TX: U3.44 U4.1 | length 15.5
  Top w0.152: v1(35.24,24.41) 35.305,24.41 U4.1@35.305,22.7
  Bottom w0.152: v1(35.24,24.41) 35.61,24.41 36.5,25.3 36.789,25.3 40.595,29.106 40.595,30.08 40.02,30.655 37.584,30.655 36.949,31.29 35.74,31.29 U3.44@35.64,31.19
CUR1: R22.P$1 U7.23 | length 2
  Top w0.2: U7.23@25.557,22.066 26.722,20.9 R22.P$1@27.04,20.9
CUR2: R23.P$1 U7.22 | length 2.1
  Top w0.2: U7.22@25.203,21.712 25.65,21.265 R23.P$1@25.65,19.8
CUR3: R24.P$1 U7.21 | length 2.6
  Top w0.152: R24.P$1@24.85,18.91 R24.P$1@24.96,18.8
  Top w0.2: R24.P$1@24.85,18.91 U7.21@24.85,21.358
DAC: DAC.P$1 R2.P$1 R3.P$2 U3.12 | length 15.6
  Top w0.152: v1(28.785,28.015) 29.073,28.015 29.19,28.132 29.768,28.132 31.2,26.7 31.2,25.4 v1(30.8,25)
  Bottom w0.152: R2.P$1@28.7,16.85 R3.P$2@29.87,16.85 29.87,17.91 DAC.P$1@30.1,18.14 30.1,18.6 30.3,18.8 30.3,20.7 30.905,21.305 30.905,24.451 30.8,24.556 v1(30.8,25) ; v1(28.785,28.015) 28.965,28.015 U3.12@29.44,28.49
DRV8323_CS: U3.17 U7.30 | length 13.4
  Top w0.152: U7.30@28.032,24.54 28.311,24.261 v1(28.72,24.261)
  Bottom w0.152: v1(28.72,24.261) 28.139,24.261 24.819,27.581 24.819,30.6 25.096,30.876 26.624,30.876 26.8,30.7 27.852,30.7 28.32,31.169 28.719,31.169 U3.17@28.74,31.19
DRV8323_MISO: R25.P$2 U3.40 U7.27 | length 22.7
  Top w0.152: U7.27@26.971,23.48 27.319,23.132 28.712,23.132 29.303,22.54 29.74,22.54 29.992,22.792 29.992,23.192 30.9,24.1 31.531,24.1 32.436,25.005 34.2,25.005 ; v1(34.3,25.55) 34.3,25.105 34.2,25.005 ; v1(38.328,32.7) 38.315,32.687 38.315,28.835 34.484,25.005 34.2,25.005
  Bottom w0.152: v1(34.3,25.55) 34.57,25.55 R25.P$2@34.86,25.84 ; U3.40@35.64,33.19 35.72,33.27 37.758,33.27 v1(38.328,32.7)
DRV8323_MOSI: U3.2 U7.28 | length 14.3
  Top w0.152: U7.28@27.324,23.833 27.721,23.437 29.235,23.437 v1(29.434,23.238)
  Route15 w0.152: v1(29.434,23.238) 29.434,22.896 v1(31.33,21)
  Bottom w0.152: v1(31.33,21) 31.33,23.63 32.39,24.69 32.583,24.69 34.432,26.54 34.44,26.54 U3.2@34.44,28.49
DRV8323_SCLK: U3.39 U7.29 | length 20.3
  Top w0.152: U7.29@27.678,24.187 28,23.865 28,23.805 28.059,23.746 30.115,23.746 30.778,24.409 31.409,24.409 32.311,25.311 32.331,25.311 32.775,25.755 33.784,25.755 34.47,26.442 35.49,26.442 37.961,28.912 37.95,28.912 37.95,32.239 37.82,32.37 37.82,33.04 v1(38.32,33.54)
  Bottom w0.152: U3.39@35.64,33.69 38.17,33.69 v1(38.32,33.54)
FCUR1: C34.P$1 R22.P$2 U3.11 | length 14.4
  Top w0.152: C34.P$1@28.11,19.81 29.02,18.9 v1(29.1,18.9) ; v1(29.4,27.624) 29.776,27.624 30.8,26.6 30.8,26.261 29.952,25.413 v1(29.952,24.973)
  Top w0.5: C34.P$1@28.11,19.81 28.11,20.87 R22.P$2@28.14,20.9
  Bottom w0.152: v1(29.1,18.9) 29.1,20.099 30.6,21.599 30.6,24.325 v1(29.952,24.973) ; v1(29.4,27.624) 29.5,27.624 29.612,27.736 29.585,27.736 29.94,28.092 U3.11@29.94,28.49
FCUR2: C35.P$1 R23.P$2 U3.14 | length 16.8
  Top w0.152: R23.P$2@26.75,19.8 v1(27.3,19.8)
  Top w0.5: C35.P$1@27.1,18.79 27.1,19.6 v1(27.3,19.8)
  Bottom w0.152: v1(27.3,19.8) 27.25,19.85 27.6,20.2 28.77,20.2 30.28,21.71 30.28,23.91 29.11,25.08 28.493,25.08 28.192,25.381 28.192,25.408 26.572,27.028 26.572,28.472 27.395,29.295 27.926,29.295 28.321,29.69 U3.14@28.74,29.69
FCUR3: C36.P$1 R24.P$2 U3.18 | length 22.7
  Top w0.152: v1(25.6,18.3) 26.05,17.85 C36.P$1@26.11,17.79
  Top w0.5: C36.P$1@26.05,17.85 26.05,18.79 R24.P$2@26.06,18.8
  Route15 w0.152: v1(26.462,32.054) 26.578,31.938 26.578,29.502 v1(26.608,29.472)
  Bottom w0.152: v1(25.6,18.3) 25.6,18.9 27.21,20.51 28.644,20.51 29.975,21.841 29.975,23.746 28.946,24.775 28.156,24.775 26.258,26.673 26.258,29.122 v1(26.608,29.472) ; v1(26.462,32.054) 26.559,31.957 28.022,31.957 28.289,31.69 U3.18@28.74,31.69
GHA: D5.1 R28.P$1 U7.6 | length 12
  Top w0.05: 20.22,28.703 20.278,28.759 U7.6@22.163,26.874
  Top w0.384: R28.P$1@17.85,35.9 18.07,36.12 D5.1@18.07,36.81
  Top w0.5: R28.P$1@17.85,35.9 17.8,35.9 19.06,34.64 19.06,29.863 20.22,28.703
GHA_D: D5.2 Q1.4 R28.P$2 | length 13.2
  Top w0.384: D5.2@16.47,36.81 16.47,36.212 16.57,36.18 16.533,36.117 R28.P$2@16.75,35.9
  Top w0.4: Q1.4@5.51,35.895 5.964,35.091 5.938,35.058 11.898,35.058 12.648,35.808
  Top w0.5: 12.648,35.808 16.458,35.808 R28.P$2@16.75,35.9
GHB: D8.1 R30.P$1 U7.15 | length 7
  Top w0.05: 20.423,21.577 U7.15@22.163,23.126
  Top w0.384: R30.P$1@17.369,20.139 17.722,20.139 D8.1@18.186,19.676
  Top w0.5: R30.P$1@17.369,20.139 17.878,20.648 19.493,20.648 20.423,21.577
GHB_D: D8.2 Q3.4 R30.P$2 | length 14.1
  Top w0.384: R30.P$2@16.591,19.361 16.591,19.008 D8.2@17.054,18.544
  Top w0.4: Q3.4@5.16,18.005 6.087,17.078 11.658,17.078 13.491,18.911
  Top w0.5: Q3.4@5.16,18.005 Q3.4@5.51,18.135 ; 13.491,18.911 16.141,18.911 R30.P$2@16.591,19.361
GHC: D11.1 R32.P$1 U7.16 | length 6.8
  Top w0.05: 21.057,21.243 U7.16@22.516,22.773
  Top w0.384: R32.P$1@18.409,18.629 18.652,18.629 D11.1@19.176,18.106
  Top w0.5: R32.P$1@18.409,18.629 18.444,18.629 21.057,21.243
GHC_D: D11.2 Q5.4 R32.P$2 | length 17.5
  Top w0.384: R32.P$2@17.631,17.851 17.631,17.388 D11.2@18.044,16.974
  Top w0.4: Q5.4@5.51,12.215 5.247,12.218 6.019,11.446 6.171,11.39 11.767,11.39 12.33,11.722 14.202,12.904 14.201,14.599 ; R32.P$2@17.492,17.851 R32.P$2@17.631,17.851
  Top w0.5: 14.201,14.599 R32.P$2@17.492,17.851
GLA: D3.1 R27.P$1 U7.8 | length 8.3
  Top w0.05: 19.271,27.776 21.003,26.519 21.306,26.317 U7.8@21.456,26.167
  Top w0.384: D3.1@16.58,31.33 17.13,31.33 R27.P$1@17.5,31.6
  Top w0.5: R27.P$1@17.5,31.6 17.503,29.53 19.271,27.776
GLA_D: D3.2 D4.1 Q2.4 R27.P$2 | length 9.1
  Top w0.384: D4.1@16.06,33.85 16.45,33.85 ; D3.2@16.58,32.93 17.17,32.93 R27.P$2@17.5,32.7
  Top w0.4: Q2.4@10.94,33.785 12.38,33.785 13.269,34.648 15.652,34.648
  Top w0.5: 15.652,34.648 16.45,33.85 17.4,32.9 R27.P$2@17.5,32.7
GLB: D6.1 R29.P$1 U7.13 | length 4.1
  Top w0.05: 20.2,23.2 U7.13@21.456,23.833
  Top w0.384: D6.1@18.016,22.134 18.438,22.134 R29.P$1@19.172,22.868
  Top w0.5: R29.P$1@19.172,22.868 19.272,22.768 19.768,22.768 20.2,23.2
GLB_D: D6.2 D7.1 Q4.4 R29.P$2 | length 14
  Top w0.384: D6.2@16.884,23.266 16.884,23.268 R29.P$2@17.828,24.212 19.251,25.634 D7.1@19.466,25.634
  Top w0.4: Q4.4@10.94,27.865 10.855,28.045 16.855,28.045 17.428,27.472
  Top w0.5: 17.428,27.472 17.428,24.912 17.828,24.512 R29.P$2@17.828,24.212
GLC: D9.1 R31.P$1 U7.18 | length 3.2
  Top w0.384: R31.P$1@20.989,17.889 20.989,17.92 R31.P$1@21.041,18.011
  Top w0.5: R31.P$1@20.989,17.889 21.25,18.15 21.25,19.58 22.12,20.45
GLC_D: D9.2 D10.1 Q6.4 R31.P$2 | length 15.5
  Top w0.384: R31.P$2@20.211,17.111 D10.1@20.903,16.419
  Top w0.4: Q6.4@10.94,10.105 10.99,9.905 11.525,10.095 13.012,10.948 13.22,11.08 13.363,11.16 14.493,11.813 15.376,12.36 15.36,13.921 16.469,15.03
  Top w0.5: 16.469,15.03 18.13,15.03 R31.P$2@20.211,17.111 ; D10.1@20.903,16.419 20.927,16.396 D10.1@20.996,16.396 21.94,17.34 D9.2@22.07,17.34